# Altium PCB FAR_PCB.PcbDoc
Units mm, origin at the board's own origin, x right, y up, seen from the top; angles counter-clockwise.
Board outline 134.94 x 132.72 mm, 4 copper layers (Top Layer, Layer 1, Layer 2, Bottom Layer), stack 0.664 mm thick; 72 components, 80 nets, 398 pads, 24 vias.
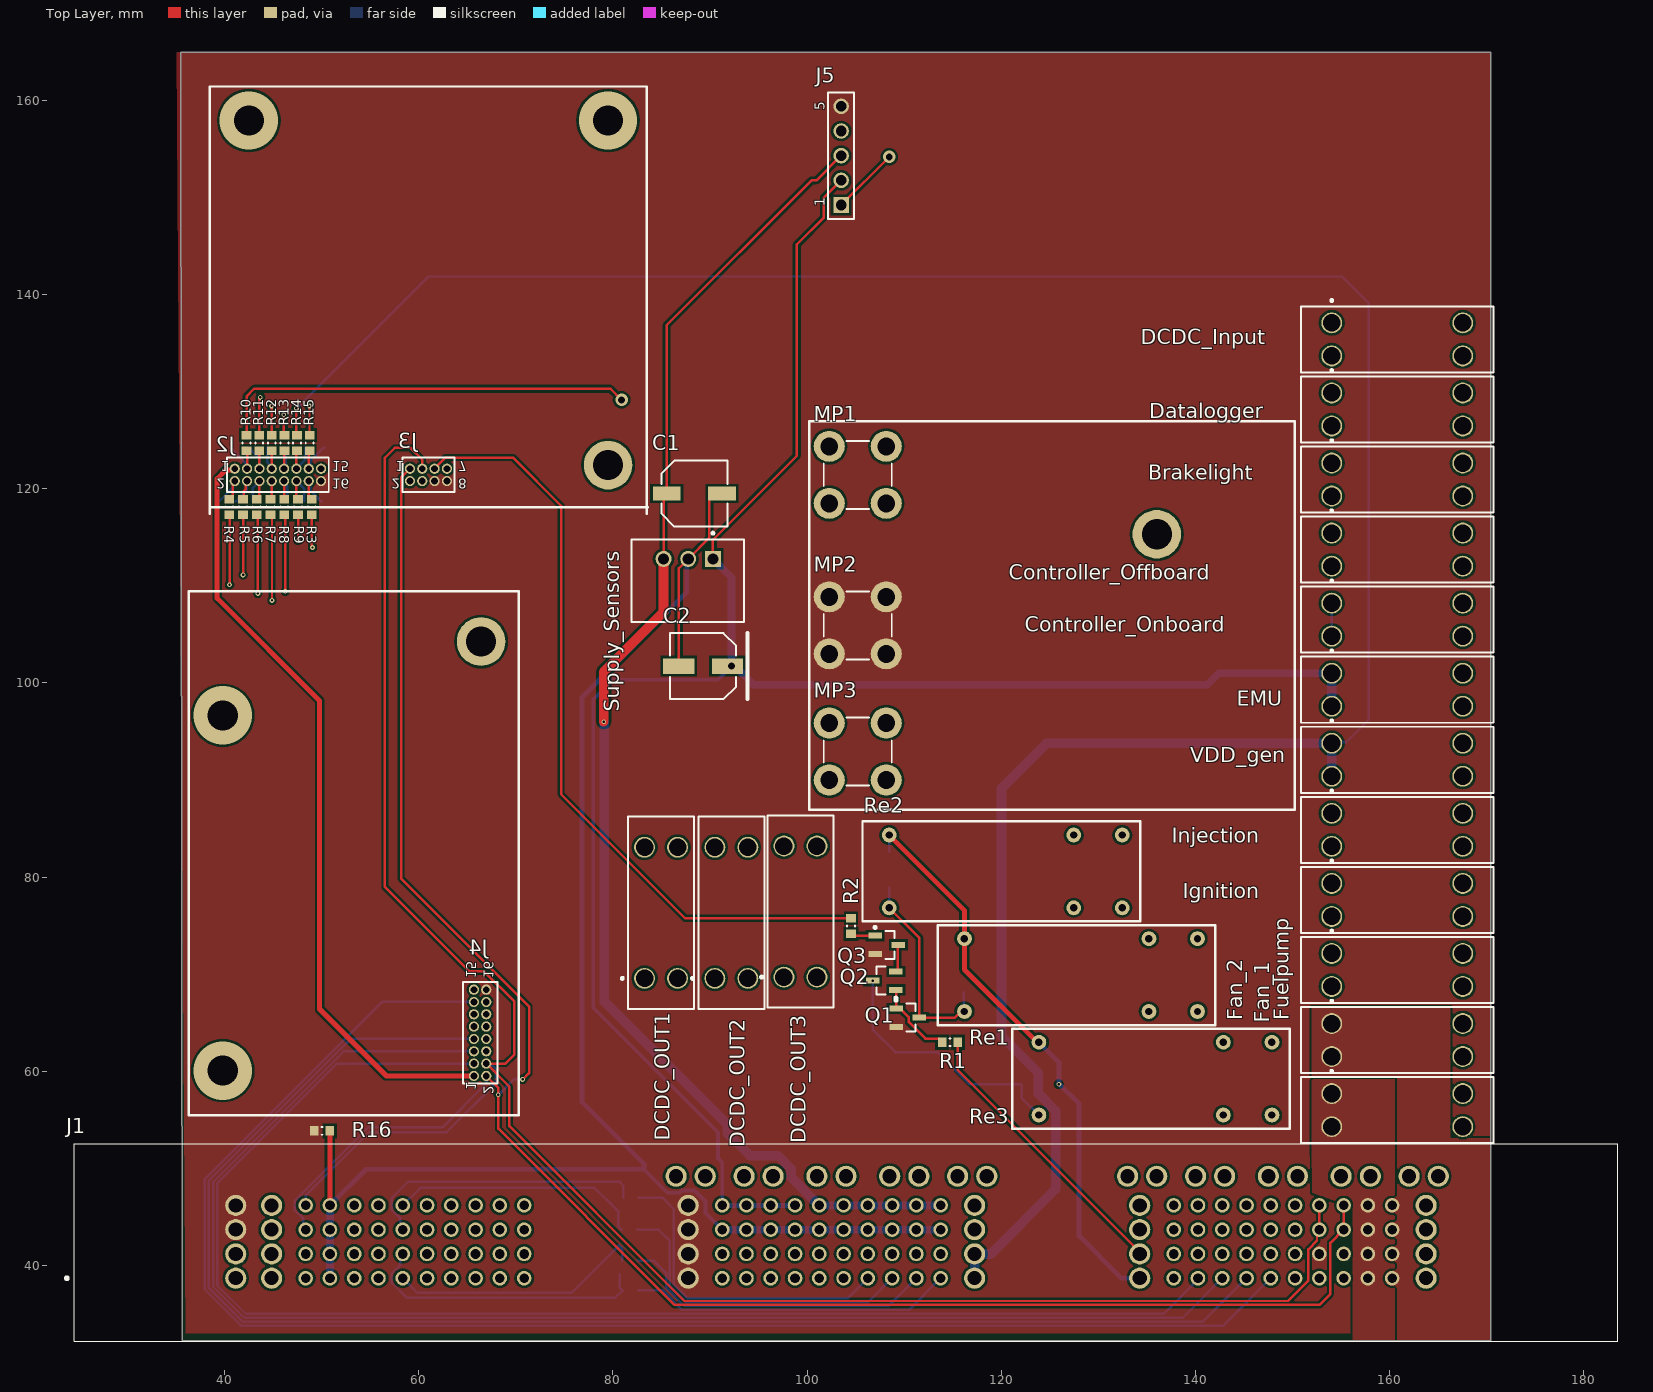
[diagram p0: Top Layer view]
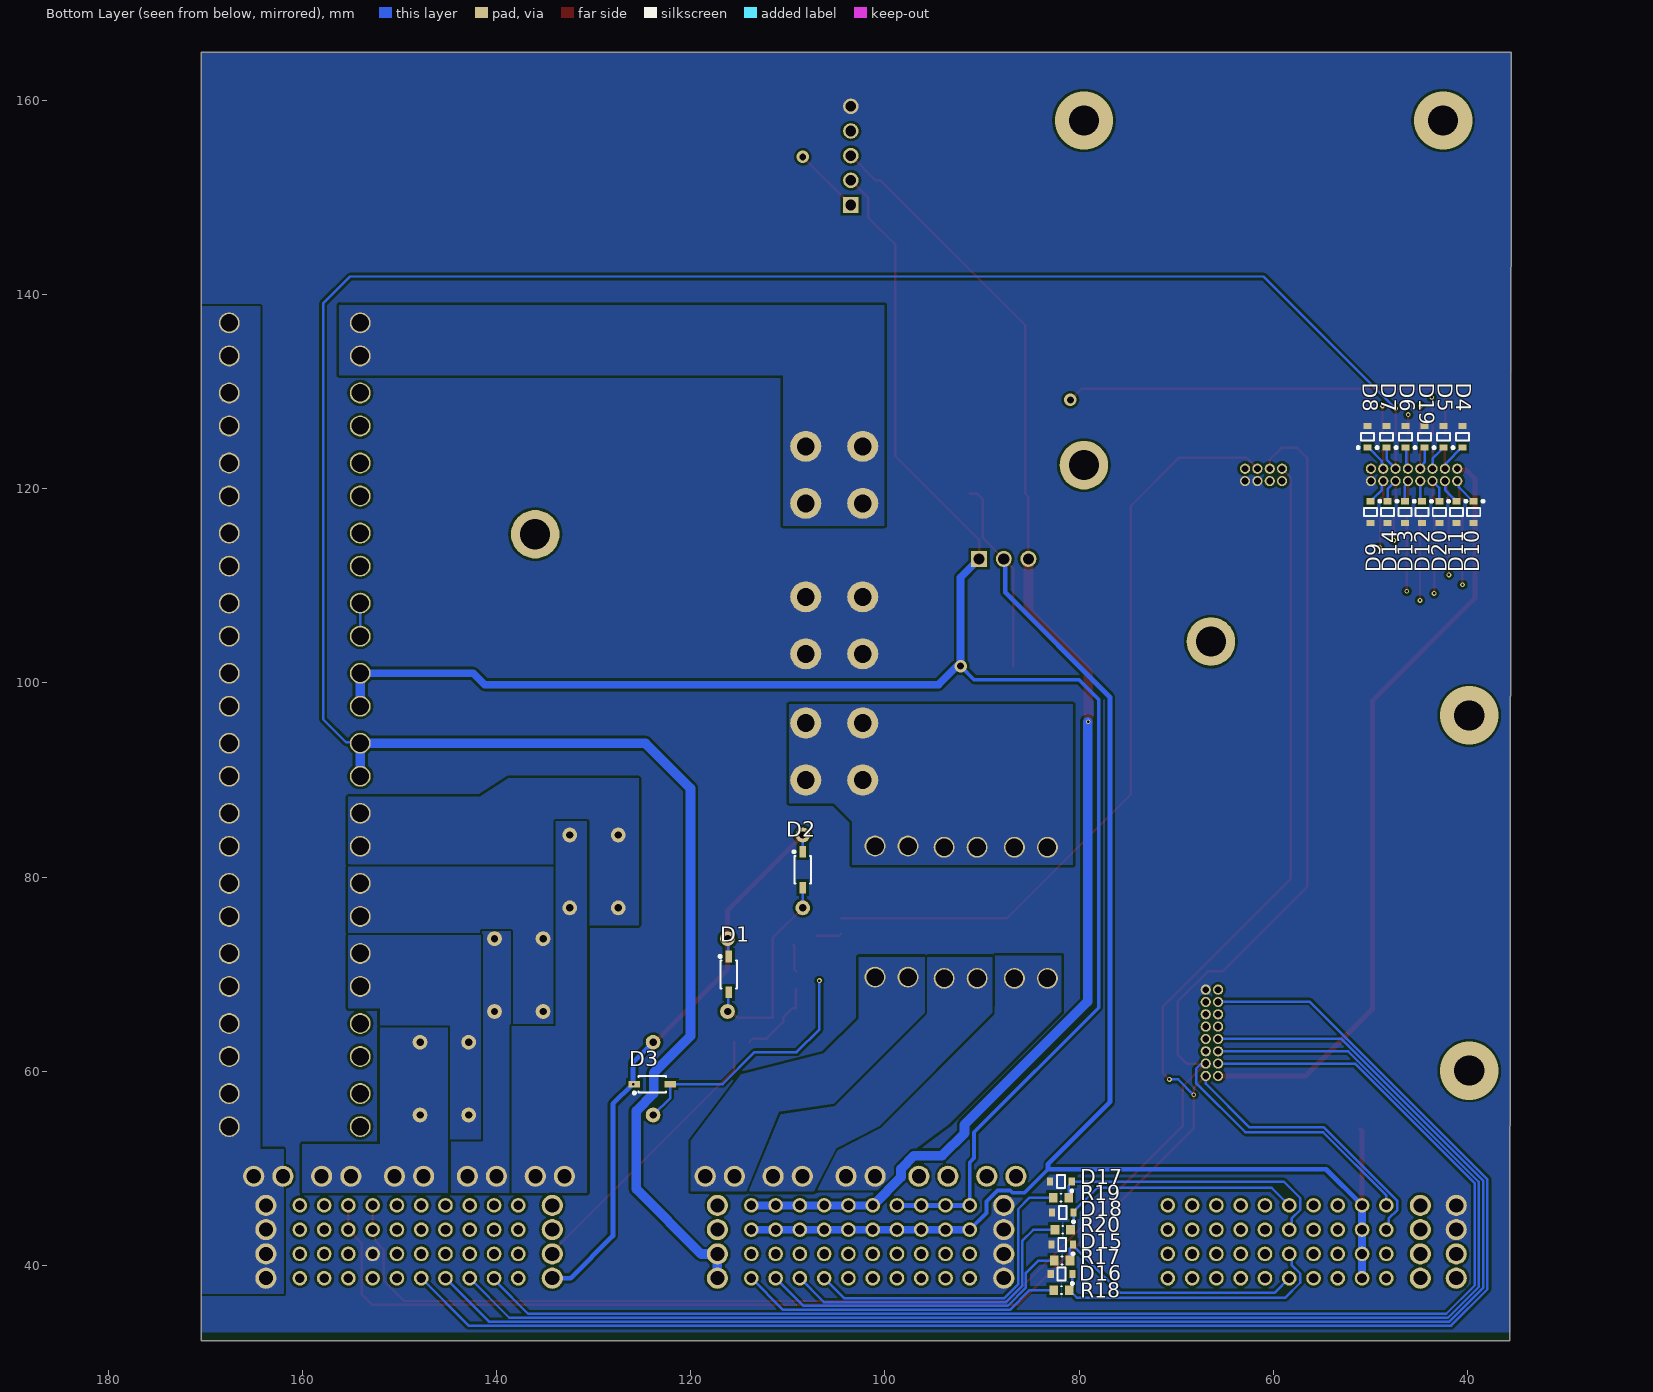
[diagram p1: Bottom Layer view, seen from below]
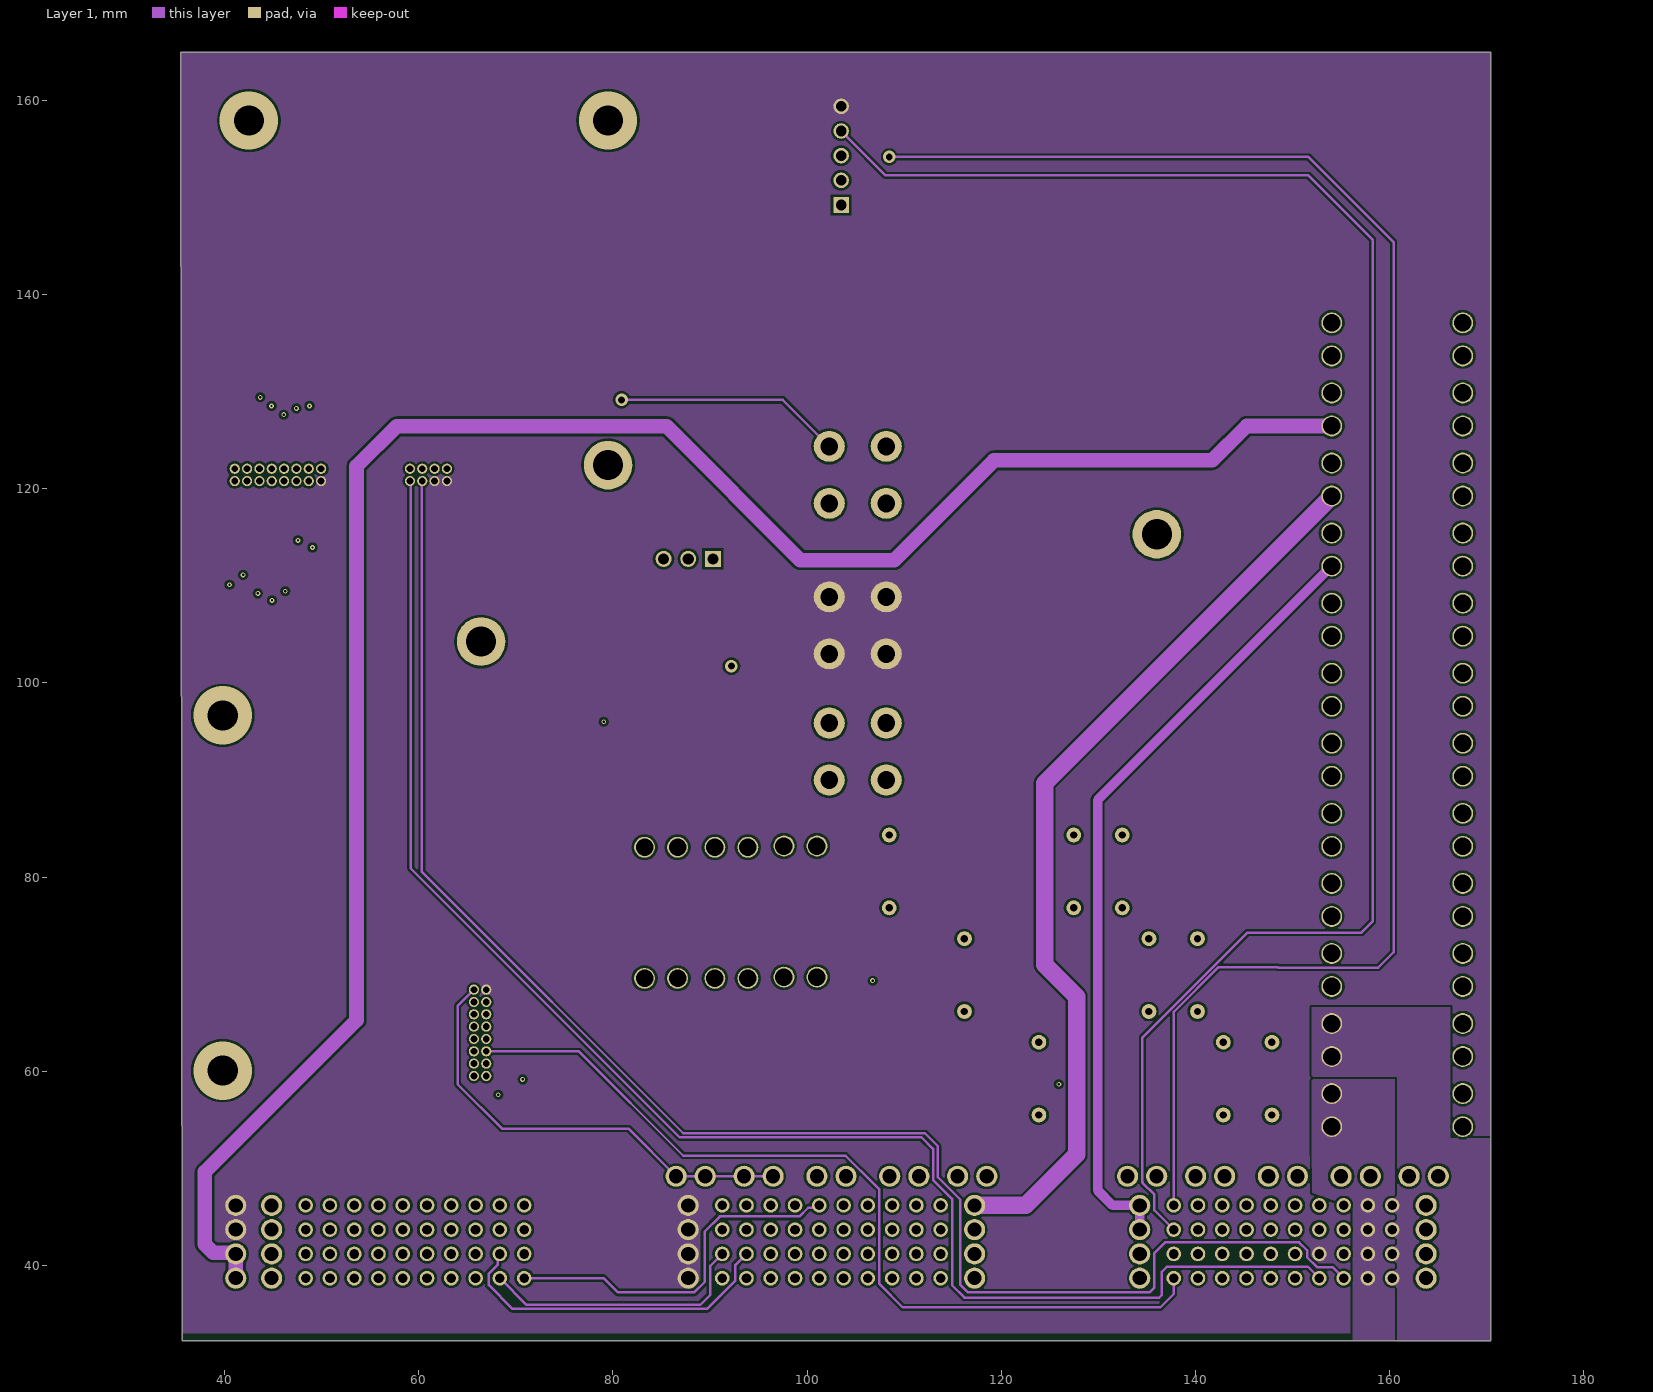
[diagram p2: Layer 1]
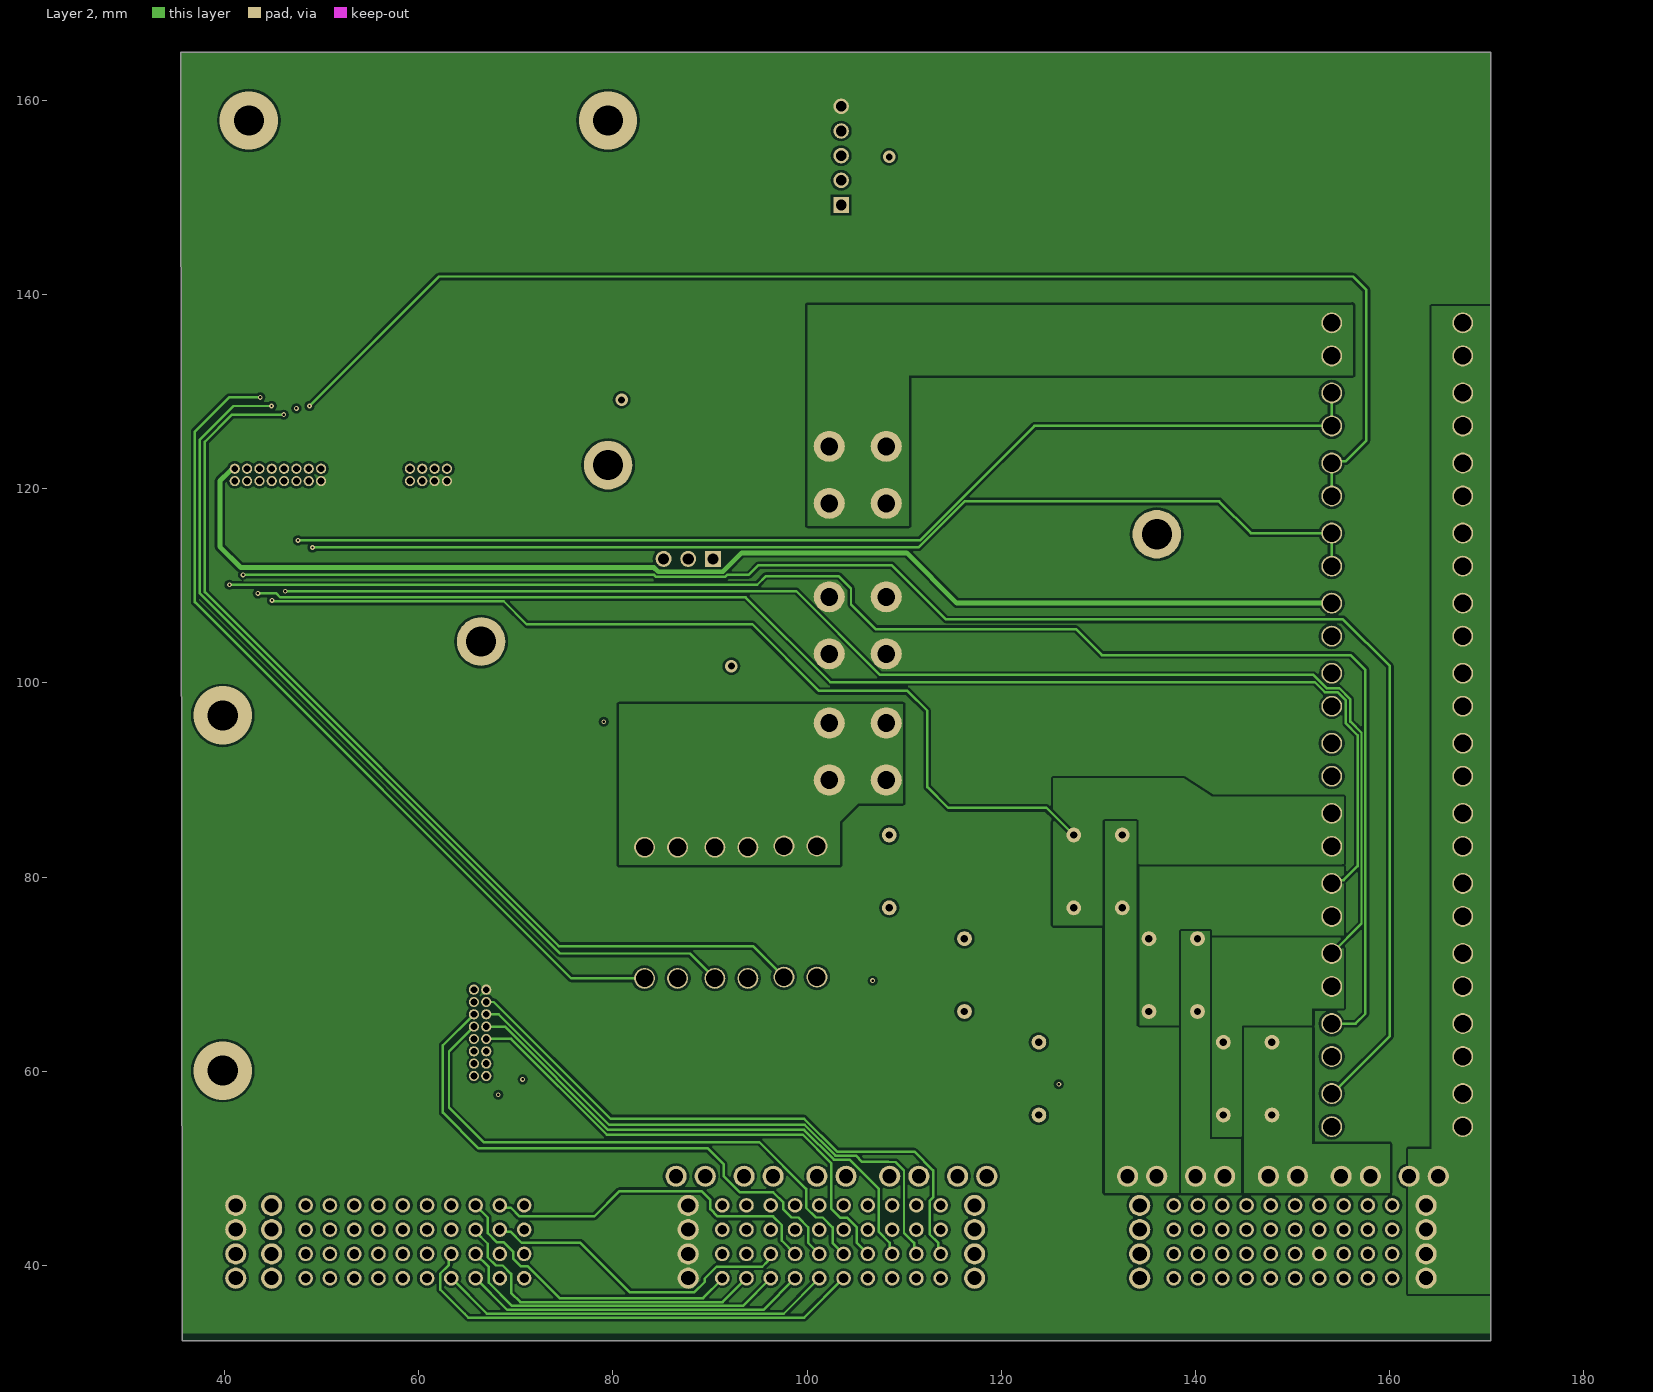
[diagram p3: Layer 2]
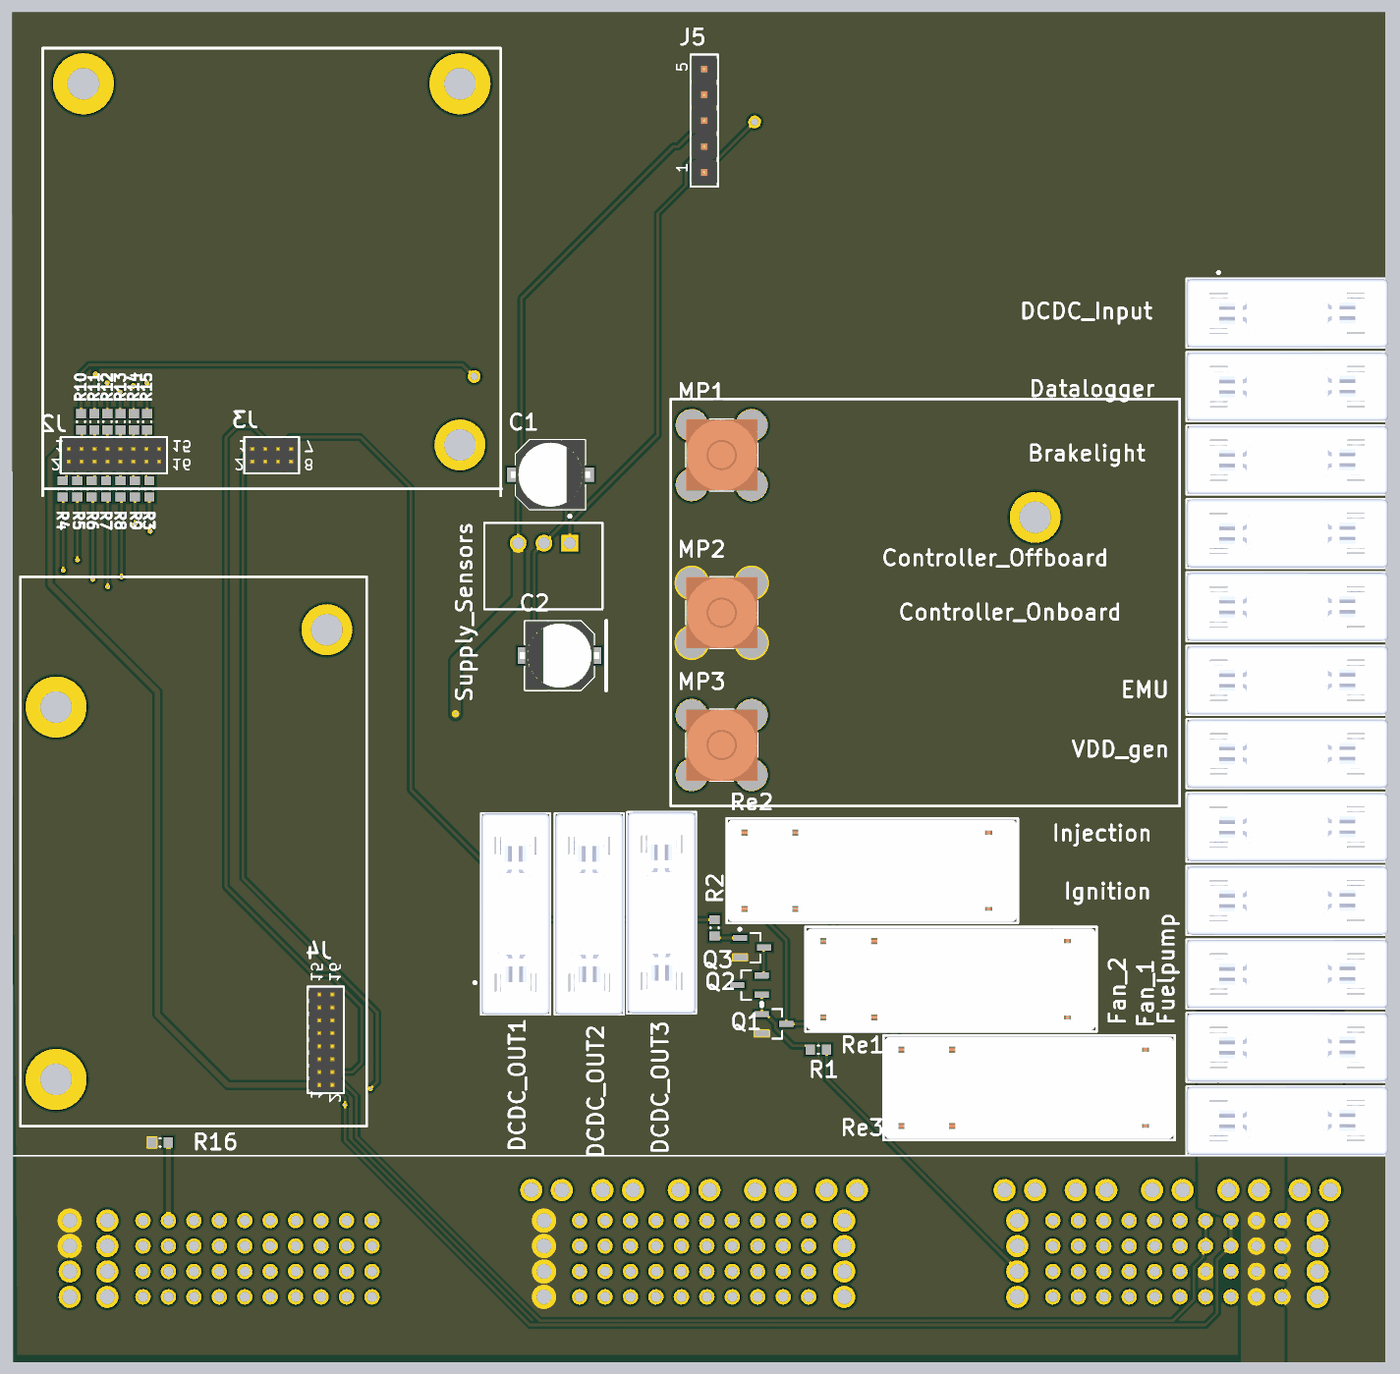
[diagram p4: 3D render of the assembled board from above, using the file's embedded part models]

## Layer stack, top to bottom
Top Solder: solder mask 0.0102, Solder Resist, Dk 3.5
Top Layer: signal copper 0.0356
Dielectric 2: core 0.1016, Core-009, Dk 4.5
Layer 1: signal copper 0.035
Dielectric 1: dielectric 0.32, FR-4, Dk 4.8
Layer 2: signal copper 0.035
Dielectric 3: core 0.1016, Core-009, Dk 4.5
Bottom Layer: signal copper 0.0356
Bottom Solder: solder mask 0.0102, Solder Resist, Dk 3.5

## Board outline
35.623,32.258 170.434,32.258 170.434,164.973 35.496,164.973

## Design rules (kind name [scope] priority, off if disabled: settings)
Clearance [All] p1: gap=0.254 ignorepadtopadclearanceinfootprint=TRUE except(0: Arc-Hole Track-Hole SMDPad-Hole THPad-Hole Via-Hole Fill-Hole Poly-Hole Region-Hole Text-Hole; 0.15: Arc-Arc Arc-Track Track-Track)
PlaneConnect [All] p1: planeconnectstyle=Direct reliefexpansion=0.508 reliefentries=4 reliefconductorwidth=0.254 reliefairgap=0.254
PolygonConnect [All] p1: connectstyle=Direct reliefconductorwidth=0.254 reliefentries=4 polygonreliefangle="90 Angle" airgapwidth=0.254
RoutingVias [All] p1: holewidth=0.711 width=1.27 viastyle="Through Hole" minholewidth=0.711 minwidth=1.27 maxholewidth=0.711 maxwidth=1.27
SolderMaskExpansion [All] p1: expansion=0.102
Width [All] p1: maxlimit=10 minlimit=0.254 preferedwidth=0.254 minimp=50.000000 maximp=50.000000 favimp=50.000000
29 further rules are at their usual default settings.

## Components (designator, comment, footprint, x,y, rotation, side; value= is the part's Value field where it differs from the comment)
Brakelight "3557-2" KSTN-3557-2 160.782,120.95 r0 top
C1 "EEEFK1C101P" PNSC-EEEFK1C101P_L 88.392,119.507 r0 top
C2 "EEEFK1E101XP" PNSC-FK-V-D8_V 89.281,101.727 r180 top
Controller_Offboard "3557-2" KSTN-3557-2 160.782,113.734 r0 top
Controller_Onboard "3557-2" KSTN-3557-2 160.782,106.518 r0 top
D1 "BAT46W-7-F" DIOD-SOD-123-2_V 116.078,69.977 r90 bottom
D2 "BAT46W-7-F" DIOD-SOD-123-2_V 108.458,80.772 r90 bottom
D3 "BAT46W-7-F" DIOD-SOD-123-2_V 123.952,58.674 r0 bottom
D4 "MM3Z4V7T1G" ONSC-SOD-323-2-477-02_V 40.513,125.349 r90 bottom
D5 "MM3Z4V7T1G" ONSC-SOD-323-2-477-02_V 42.469,125.349 r90 bottom
D6 "MM3Z4V7T1G" ONSC-SOD-323-2-477-02_V 46.38,125.349 r90 bottom
D7 "MM3Z4V7T1G" ONSC-SOD-323-2-477-02_V 48.336,125.349 r90 bottom
D8 "MM3Z4V7T1G" ONSC-SOD-323-2-477-02_V 50.292,125.349 r90 bottom
D9 "MM3Z4V7T1G" ONSC-SOD-323-2-477-02_V 49.993,117.602 r270 bottom
D10 "MM3Z4V7T1G" ONSC-SOD-323-2-477-02_V 39.36,117.602 r270 bottom
D11 "MM3Z4V7T1G" ONSC-SOD-323-2-477-02_V 41.132,117.602 r270 bottom
D12 "MM3Z4V7T1G" ONSC-SOD-323-2-477-02_V 44.676,117.602 r270 bottom
D13 "MM3Z4V7T1G" ONSC-SOD-323-2-477-02_V 46.448,117.602 r270 bottom
D14 "MM3Z4V7T1G" ONSC-SOD-323-2-477-02_V 48.221,117.602 r270 bottom
D15 "MM3Z4V7T1G" ONSC-SOD-323-2-477-02_V 81.747,42.164 r0 bottom
D16 "MM3Z4V7T1G" ONSC-SOD-323-2-477-02_V 81.806,39.116 r0 bottom
D17 "MM3Z4V7T1G" ONSC-SOD-323-2-477-02_V 81.869,48.641 r0 bottom
D18 "MM3Z4V7T1G" ONSC-SOD-323-2-477-02_V 81.688,45.466 r0 bottom
D19 "MM3Z4V7T1G" ONSC-SOD-323-2-477-02_V 44.425,125.349 r90 bottom
D20 "MM3Z4V7T1G" ONSC-SOD-323-2-477-02_V 42.904,117.602 r270 bottom
Datalogger "3557-2" KSTN-3557-2 160.782,135.382 r0 top
DCDC_Input "3557-2" KSTN-3557-2 160.782,128.166 r0 top
DCDC_OUT1 "3557-2" KSTN-3557-2 84.963,76.327 r90 top
DCDC_OUT2 "3557-2" KSTN-3557-2 92.202,76.327 r90 top
DCDC_OUT3 "3557-2" KSTN-3557-2 99.314,76.454 r90 top
EMU "3557-2" KSTN-3557-2 160.782,99.302 r0 top
Fan_1 "3557-2" KSTN-3557-2 160.782,63.223 r0 top
Fan_2 "3557-2" KSTN-3557-2 160.782,56.007 r0 top
Fuelpump "3557-2" KSTN-3557-2 160.782,70.439 r0 top
Ignition "3557-2" KSTN-3557-2 160.782,77.655 r0 top
Injection "3557-2" KSTN-3557-2 160.782,84.871 r0 top
J1 "34763-0001" *MOLEX_34763-0001_34763-0001(Primary) 41.157,38.695 r0 top
J2 "62201621121" 62201621121 45.502,121.428 r0 top
J3 "62200821121" 62200821121 61.002,121.428 r0 top
J4 "62201621121" 62201621121 66.321,63.967 r90 top
J5 "61300511121" 61300511121 103.505,154.305 r90 top
MP1 "M3x5mm" 74651173 105.217,121.436 r0 top
MP2 "M3x5mm" 74651173 105.217,105.936 r0 top
MP3 "M3x5mm" 74651173 105.217,92.936 r0 top
Q1 "50C02CH-TL-E" ONSC-CPH-3_V 110.363,65.532 r0 top
Q2 "50C02CH-TL-E" ONSC-CPH-3_V 107.95,69.342 r180 top
Q3 "50C02CH-TL-E" ONSC-CPH-3_V 108.204,73.025 r0 top
R1 "10K 5% 0603(1608)" RESC0603(1608)_N 114.719,62.992 r180 top value="10000.00 Ohm"
R2 "10K 5% 0603(1608)" RESC0603(1608)_N 104.521,74.968 r270 top value="10000.00 Ohm"
R3 "10k 0603" RESC0603(1608)_N 48.978,118.11 r270 top value="10000.00 Ohm"
R4 "10k 0603" RESC0603(1608)_N 40.476,118.11 r270 top value="10000.00 Ohm"
R5 "10k 0603" RESC0603(1608)_N 41.893,118.11 r270 top value="10000.00 Ohm"
R6 "10k 0603" RESC0603(1608)_N 43.31,118.11 r270 top value="10000.00 Ohm"
R7 "10k 0603" RESC0603(1608)_N 44.727,118.11 r270 top value="10000.00 Ohm"
R8 "10k 0603" RESC0603(1608)_N 46.144,118.11 r270 top value="10000.00 Ohm"
R9 "10k 0603" RESC0603(1608)_N 47.561,118.11 r270 top value="10000.00 Ohm"
R10 "10k 0603" RESC0603(1608)_N 42.269,124.714 r90 top value="10000.00 Ohm"
R11 "10k 0603" RESC0603(1608)_N 43.569,124.714 r90 top value="10000.00 Ohm"
R12 "10k 0603" RESC0603(1608)_N 44.869,124.714 r90 top value="10000.00 Ohm"
R13 "10k 0603" RESC0603(1608)_N 46.168,124.714 r90 top value="10000.00 Ohm"
R14 "10k 0603" RESC0603(1608)_N 47.468,124.714 r90 top value="10000.00 Ohm"
R15 "10k 0603" RESC0603(1608)_N 48.768,124.714 r90 top value="10000.00 Ohm"
R16 "0 0603" RESC0603(1608)_N 50.038,53.867 r0 top value="10000.00 Ohm"
R17 "10k 0603" RESC0603(1608)_N 81.747,40.513 r0 bottom value="10000.00 Ohm"
R18 "10k 0603" RESC0603(1608)_N 81.806,37.465 r0 bottom value="10000.00 Ohm"
R19 "10k 0603" RESC0603(1608)_N 81.869,46.99 r0 bottom value="10000.00 Ohm"
R20 "10k 0603" RESC0603(1608)_N 81.688,43.688 r0 bottom value="10000.00 Ohm"
Re1 "Ignition" "Finder 436190120300" 116.205,66.167 r0 top
Re2 "Injection" "Finder 436190120300" 108.458,76.835 r0 top
Re3 "Fuelpump" "Finder 436190120300" 123.875,55.499 r0 top
Supply_Sensors "R-78E5.0-0.5" REPO-R-78E-0.5-3_V 87.757,112.776 r180 top
VDD_gen "3557-2" KSTN-3557-2 160.782,92.087 r0 top

## Footprints (in the part's own frame and the unit in brackets; to place one, negate y for a bottom-side part, rotate by r counter-clockwise, add the part's x,y. Pads: shape width x height; smd on the part's side, far side on the other; paste and mask are expansions set on the pad)
74651173 [mm] "Shank, THR, 4 pins, 7x7mm, M3, thread 5mm"
  round 3.2 hole 1.85: 1(-2.935,-2.935) 1(-2.935,2.935) 1(2.935,-2.935) 1(2.935,2.935)
  silkscreen extent -3.5,-3.5 3.5,3.5, body extent -3.5,-3.5 3.5,3.5, height 8.5
61300511121 [mm] "Pin Header, pitch 2.54 mm, THT, Vertical, single row, 5p"
  rect 1.6x1.6 hole 1.1: 1(-5.08,0)
  round 1.6 hole 1.1: 2(-2.54,0) 3(0,0) 4(2.54,0) 5(5.08,0)
  silkscreen extent -6.5,-1.34 6.5,1.34, body extent -6.35,-1.27 6.35,1.27, height 8.57
62200821121 [mm] "Pin Header, pitch 1.27 mm, THT, Vertical, dual row, 8p"
  round 1.05 hole 0.7: 1(-1.905,0.635) 2(-1.905,-0.635) 3(-0.635,0.635) 4(-0.635,-0.635) 5(0.635,0.635) 6(0.635,-0.635) 7(1.905,0.635) 8(1.905,-0.635)
  silkscreen extent -2.69,-1.78 2.69,1.78, body extent -2.54,-1.7 2.54,1.7, height 5.33
62201621121 [mm] "Pin Header, pitch 1.27 mm, THT, Vertical, dual row, 16p"
  round 1.05 hole 0.7: 1(-4.445,0.635) 2(-4.445,-0.635) 3(-3.175,0.635) 4(-3.175,-0.635) 5(-1.905,0.635) 6(-1.905,-0.635) 7(-0.635,0.635) 8(-0.635,-0.635) 9(0.635,0.635) 10(0.635,-0.635) 11(1.905,0.635) 12(1.905,-0.635) 13(3.175,0.635) 14(3.175,-0.635) 15(4.445,0.635) 16(4.445,-0.635)
  silkscreen extent -5.23,-1.78 5.23,1.78, body extent -5.08,-1.7 5.08,1.7, height 5.33
*MOLEX_34763-0001_34763-0001(Primary) [mm]
  round 1.508 hole 1: A1(29.7,0) A2(29.7,2.5) A3(29.7,5) A4(29.7,7.5) B1(27.2,0) B2(27.2,2.5) B3(27.2,5) B4(27.2,7.5) C1(24.7,0) C2(24.7,2.5) C3(24.7,5) C4(24.7,7.5) D1(22.2,0) D2(22.2,2.5) D3(22.2,5) D4(22.2,7.5) E1(19.7,0) E2(19.7,2.5) E3(19.7,5) E4(19.7,7.5) F1(17.2,0) F2(17.2,2.5) F3(17.2,5) F4(17.2,7.5) G1(14.7,0) G2(14.7,2.5) G3(14.7,5) G4(14.7,7.5) H1(12.2,0) H2(12.2,2.5) H3(12.2,5) H4(12.2,7.5) J1(9.7,0) J2(9.7,2.5) J3(9.7,5) J4(9.7,7.5) K1(7.2,0) K2(7.2,2.5) K3(7.2,5) K4(7.2,7.5) Y7(50.1,7.5) Y8(52.6,7.5) Y9(55.1,7.5) Y10(57.6,7.5) Y11(60.1,7.5) Y12(62.6,7.5) Y13(65.1,7.5) Y14(67.6,7.5) Y15(70.1,7.5) Y16(72.6,7.5) Y19(50.1,5) Y20(52.6,5) Y21(55.1,5) Y22(57.6,5) Y23(60.1,5) Y24(62.6,5) Y25(65.1,5) Y26(67.6,5) Y27(70.1,5) Y28(72.6,5) Y31(50.1,2.5) Y32(52.6,2.5) Y33(55.1,2.5) Y34(57.6,2.5) Y35(60.1,2.5) Y36(62.6,2.5) Y37(65.1,2.5) Y38(67.6,2.5) Y39(70.1,2.5) Y40(72.6,2.5) Y43(50.1,0) Y44(52.6,0) Y45(55.1,0) Y46(57.6,0) Y47(60.1,0) Y48(62.6,0) Y49(65.1,0) Y50(67.6,0) Y51(70.1,0) Y52(72.6,0) Z7(96.6,7.5) Z8(99.1,7.5) Z9(101.6,7.5) Z10(104.1,7.5) Z11(106.6,7.5) Z12(109.1,7.5) Z13(111.6,7.5) Z14(114.1,7.5) Z15(116.6,7.5) Z16(119.1,7.5) Z19(96.6,5) Z20(99.1,5) Z21(101.6,5) Z22(104.1,5) Z23(106.6,5) Z24(109.1,5) Z25(111.6,5) Z26(114.1,5) Z27(116.6,5) Z28(119.1,5) Z31(96.6,2.5) Z32(99.1,2.5) Z33(101.6,2.5) Z34(104.1,2.5) Z35(106.6,2.5) Z36(109.1,2.5) Z37(111.6,2.5) Z38(114.1,2.5) Z39(116.6,2.5) Z40(119.1,2.5) Z43(96.6,0) Z44(99.1,0) Z45(101.6,0) Z46(104.1,0) Z47(106.6,0) Z48(109.1,0) Z49(111.6,0) Z50(114.1,0) Z51(116.6,0) Z52(119.1,0)
  round 2.175 hole 1.45: L1(3.7,0) L2(3.7,2.5) L3(3.7,5) L4(3.7,7.5) M1(0,0) M2(0,2.5) M3(0,5) M4(0,7.5) Y1_1(45.35,10.5) Y1_2(48.35,10.5) Y2_1(52.35,10.5) Y2_2(55.35,10.5) Y3_1(59.85,10.5) Y3_2(62.85,10.5) Y4_1(67.35,10.5) Y4_2(70.35,10.5) Y5_1(74.35,10.5) Y5_2(77.35,10.5) Y6(46.6,7.5) Y17(76.1,7.5) Y18(46.6,5) Y29(76.1,5) Y30(46.6,2.5) Y41(76.1,2.5) Y42(46.6,0) Y53(76.1,0) Z1_1(91.85,10.5) Z1_2(94.85,10.5) Z2_1(98.85,10.5) Z2_2(101.85,10.5) Z3_1(106.35,10.5) Z3_2(109.35,10.5) Z4_1(113.85,10.5) Z4_2(116.85,10.5) Z5_1(120.85,10.5) Z5_2(123.85,10.5) Z6(93.1,7.5) Z17(122.6,7.5) Z18(93.1,5) Z29(122.6,5) Z30(93.1,2.5) Z41(122.6,2.5) Z42(93.1,0) Z53(122.6,0)
  silkscreen extent -17.55,-6.5 142.35,13.87
DIOD-SOD-123-2_V [mm] "SOD-123, 2-Leads, Body 2.85x1.7mm (max), Pitch 3.7mm"
  rect 1.2x0.7 smd: 1(-1.85,0) 2(1.85,0)
  silkscreen extent -1.42,-0.85 1.97,1.03, body extent -1.42,-0.85 1.43,0.85, height 1.45
"Finder 436190120300" [mil] "Relais 5mm"
  round 60 hole 30: 1(0,295.28) 2(0,0) 3(748.03,0) 4(944.88,0) 5(748.03,295.28) 6(944.88,295.28)
  silkscreen extent -108,-55 1018,350, body extent -105,-49 1013,344, height 537
KSTN-3557-2 [mm] "Fuse Holder, PCB Mount, Thru-Hole, Body 19.8x6.8mm, Height 7.4mm"
  round 2.15 hole 1.8: 1(-6.75,1.7) 2(-6.75,-1.7) 3(6.75,1.7) 4(6.75,-1.7)
  silkscreen extent -9.9,-3.4 9.9,4.12, body extent -9.91,-3.37 9.91,3.37, height 7.74
ONSC-CPH-3_V [mm] "SOT23, 3-Leads, Body 2.9x1.6mm, Pitch 0.95mm"
  rect 1.4x0.6 smd: 1(-1.2,0.95) 2(-1.2,-0.95) 3(1.2,0)
  silkscreen extent -1.32,-1.45 0.8,1.92, body extent -0.8,-1.45 0.8,1.45, height 1.05
ONSC-SOD-323-2-477-02_V [mm] "SOD, 2-Leads, Body 1.7x1.25mm"
  rect 0.63x0.83 smd: 1(-1.115,0) 2(1.115,0)
  silkscreen extent -1.24,-0.67 0.4,1.09, body extent -0.85,-0.63 0.85,0.63, height 1.06
PNSC-EEEFK1C101P_L [mm] "Aluminum Electrolytic Capacitor, Body 6.8x6.8mm, IPC High Density"
  rect 2.85x1.4 smd: 1(-2.85,0) 2(2.85,0)
  silkscreen extent -3.4,-3.4 3.4,3.4, body extent -3.9,-3.4 3.9,3.4, height 6.3
PNSC-FK-V-D8_V [mm] "CAPAE, 2-Leads, Body 6.80x6.80mm"
  rect 3.2x1.6 smd: 1(-2.5,0) 2(2.5,0)
  silkscreen extent -4.6,-3.4 3.4,3.4, body extent -3.9,-3.4 3.9,3.4, height 8
REPO-R-78E-0.5-3_V [mm] "THD, 3-Leads, Body 11.6x8.5mm, Pitch 2.54mm"
  rect 1.65x1.65 hole 1.15: 1(-2.54,0)
  round 1.65 hole 1.15: 2(0,0) 3(2.54,0)
  silkscreen extent -5.75,-2.77 5.85,6.5, body extent -5.75,-2 5.85,6.5, height 10.4
RESC0603(1608)_N [mm] "Chip Resistor, Body 1.6x0.8mm, IPC Medium Density"
  rect 0.9x1 smd: 1(-0.8,0) 2(0.8,0)
  silkscreen extent -0.05,-0.4 0.05,0.4, body extent -0.85,-0.47 0.85,0.47, height 0.6

## Part data
Brakelight Controller_Offboard Controller_Onboard Datalogger DCDC_Input DCDC_OUT1 DCDC_OUT2 DCDC_OUT3 EMU Fan_1 Fan_2 Fuelpump Ignition Injection VDD_gen: library part CMP-2000-05461-1, "FUSE HOLDER, PCB MOUNT, 500VAC, 20A, ROHS", Current Rating=30A, Manufacturer=Keystone-Electronics, Voltage=500V, Category=CircuitProtection, Contact Finish=TinNickel, Contact Material=Brass, Datasheet URL=http://datasheet.octopart.com/3557-2-Keystone-datasheet-15715937.pdf, Datasheet Version=Apr-13, Family=Fuseholders, For Use With/Related Products=ATC,ATO257,MINI897, Fuse Size="0.43\"Lx0.15\"Wx0.64\"H(10.92mmx3.81mmx16.25mm)", Fuse Type=Blade, Fuseholder Type=Block, Manufacturer URL=http://www.keyelco.com/, Mounting Type=PCB, Number of Circuits=1, Orientation=Vertical, Series=-, Termination Style=PCPin
C1: library part CMP-2000-06203-1, "Aluminum Electrolytic Capacitor, 100 uF, 20%, 16 V, -55 to 105 degC, 2-Pin SMD, RoHS, Tape and Reel", Capacitance=100µF, Case Size/Dimension=Ø6.3x5.8mm, Lifetime@Temperature=2000Hrs@105°C, Manufacturer=Panasonic, Operating Temp Range=-55to+105°C, Operating Temp-Max=105°C, Package Description="2-Pin Surface Mount Device, Body 6.6 x 6.6 mm", Rated Voltage=16V, Ripple Current=240mA, Datasheet URL=http://datasheet.octopart.com/EEEFK1C101P-Panasonic-datasheet-13266987.pdf, Datasheet Version=11/2012, Impedance=0.36O, Manufacturer URL=http://www.panasonic.com/, Mounting Technology=SurfaceMount, Package Reference=EEEFK1C101P, Series=FK, Type=Can
C2: library part CMP-2000-06206-1, "Aluminum Electrolytic Capacitor, 100 uF, +/- 20%, 25 V, 2-Pin SMD (Size Code D8), -55 to 105 degC, RoHS, Tape and Reel", Capacitance=100µF, Case Size/Dimension=Ø6.3x7.7mm, Lifetime@Temperature=2000Hrs@105°C, Manufacturer=Panasonic, Operating Temp Range=-55to+105°C, Operating Temp-Max=105°C, Package Description="2-Pin Electrolytic Aluminum Capacitor, Body 6.6 x 6.6 mm", Package Reference=FK-V-D8, Rated Voltage=25V, Ripple Current=280mA, Datasheet URL=http://industrial.panasonic.com/cdbs/www-data/pdf/RDE0000/ABA0000C1181.pdf, Datasheet Version=03/2016, Impedance=0.34O, Manufacturer URL=http://www.panasonic.com/, Mounting Technology=SurfaceMount, Package URL=http://industrial.panasonic.com/cdbs/www-data/pdf/RDE0000/DME0000COL48.pdf, Series=FK, Type=Can
D1 D2 D3: library part CMP-0303-00004-1, "Surface Mount Schottky Barrier Diode, 100 V, -55 to 125 degC, 2-Pin SOD123, RoHS, Tape and Reel", Manufacturer="Diodes Inc", Operating Temperature="-55 to 125 degC", ComponentLink1Description="Manufacturer URL", ComponentLink1URL=http://www.diodes.com/, ComponentLink2Description=Datasheet, ComponentLink2URL=http://diodes.com/datasheets/ds30044.pdf, ComponentLink3Description="Package Specification", ComponentLink3URL=http://diodes.com/datasheets/ds30044.pdf, CT@1 V="12 pF Typ.", DatasheetVersion="Rev. 16-2", IR@1.5 V="0.3 uA Max.", Mounting Technology="Surface Mount", PackageDescription="2-Pin SMD, Body 2.7 x 1.55 mm, Height 1.45 mm", Packing="Tape and Reel", PartNumber=BAT46W-7-F, RoHS=TRUE, V(BR)R="100 V Min.", VF@10 mA="0.45 V Max."
D4 D5 D6 D7 D8 D9 D10 D11 D12 D13 D14 D15 D16 D17 D18 D19 D20: library part CMP-1060-00657-1, "Zener Voltage Regulator, 300 mW, 2-Pin SOD-323, Pb-Free, Tape and Reel", Manufacturer="On Semiconductor", ComponentLink1Description="Manufacturer URL", ComponentLink1URL=http://www.onsemi.com/, ComponentLink2Description=Datasheet, ComponentLink2URL=http://www.onsemi.cn/pub_link/Collateral/MM3Z2V4T1-D.PDF, ComponentLink3Description="Package Specification", ComponentLink3URL=http://www.onsemi.com/pub_link/Collateral/477-02.PDF.1, DatasheetVersion="Rev. 9", Mounting Technology="Surface Mount", P Max (W)=0.3, PackageDescription="2-Pin SOD, Body 1.7 x 1.25 mm", PackageReference=SOD-323-2-477-02, PackageVersion="Rev. H, 03/2007", Packing="Tape and Reel", PartNumber=MM3Z4V7T1G, RoHS=Pb-Free, VZ Typ (V)=4.7
J1: "Automotive Connectors CMC HDR ASSY 154 WAY JD MECA 48-53-53", Package=None, Availability=Unavailable, MF=Molex, MP=34763-0001, Price=None, SnapEDA_Link=https://www.snapeda.com/parts/34763-0001/Molex/view-part/?ref=snap
J2 J4: library part CMP-1502-00950-1, "THT Vertical Pin Header WR-PHD, Pitch 1.27 mm, Dual Row, 16 pins", Contact Resistance=20mOhm, Manufacturer="Wurth Elektronik", Operating Temperature=-40to105degC, Rated Current=1A, Withstanding Voltage=500VAC, Working Voltage=100VAC, Datasheet URL=https://katalog.we-online.de/em/datasheet/62201621121.pdf, Gender=Male, Manufacturer URL=http://www.we-online.de, Mounting Technology=THT, Orientation=Vertical, Package Reference=62201621121, Packaging=Box, Part Number=62201621121, Pin Number=16, Pitch=1.27mm, Publisher=WurthElektronik, Row Number=Dual
J3: library part CMP-1502-00947-1, "THT Vertical Pin Header WR-PHD, Pitch 1.27 mm, Dual Row, 8 pins", Contact Resistance=20mOhm, Manufacturer="Wurth Elektronik", Operating Temperature=-40to105degC, Rated Current=1A, Withstanding Voltage=500VAC, Working Voltage=100VAC, Datasheet URL=https://katalog.we-online.de/em/datasheet/62200821121.pdf, Gender=Male, Manufacturer URL=http://www.we-online.de, Mounting Technology=THT, Orientation=Vertical, Package Reference=62200821121, Packaging=Box, Part Number=62200821121, Pin Number=8, Pitch=1.27mm, Publisher=WurthElektronik, Row Number=Dual
J5: "WR-PHD Pin Header, THT, pitch 2.54mm, Single Row, Vertical, 5pin", Contact Resistance=20mOhm, Operating Temperature="-40 to +105degC", Rated Current=3A, Withstanding Voltage=500VAC, Working Voltage=250VAC, ComponentLink1Description=Manufacturer, ComponentLink1URL=http://www.we-online.de, ComponentLink2Description=Datasheet, ComponentLink2URL=https://katalog.we-online.de/em/datasheet/6130xx11121.pdf, Gender=Male, Mounting Technology=THT, Orientation=Vertical, Packaging=Bag, Part Number=61300511121, Pin Number=5, Pitch=2.54mm, Published Date="June 2019", Publisher="Wurth Elektronik", Row Number=Single
MP1 MP2 MP3: library part 74651173, "WP-THRSH REDCUBE THR with external thread, 7x7mm, M3x5mm, 4 pins, 50A", Operating Temperature="-55 to +150degC", Rated Current=50A, ComponentLink1Description=Manufacturer, ComponentLink1URL=http://www.we-online.de, ComponentLink2Description=Datasheet, ComponentLink2URL=https://katalog.we-online.com/em/datasheet/74651173.pdf, Height=8.5mm, Material=Brass, Mounting Technology=SMT, Packaging=Bulk, Part Number=74651173, Pin Number=4, Published Date="September 2019", Publisher="Wurth Elektronik", Size=7x7mm, Surface=Tin, Thread=M3, Thread Length=5mm
Q1 Q2 Q3: library part CMP-1048-00075-1, "Bipolar Transistor, 50 V, 0.5 A, Low VCE(sat), NPN Single, 3-Pin CPH, Pb-Free, Tape and Reel", Manufacturer="On Semiconductor", ComponentLink1Description="Manufacturer URL", ComponentLink1URL=http://www.onsemi.com/, ComponentLink2Description=Datasheet, ComponentLink2URL=http://www.onsemi.com/pub_link/Collateral/50C02CH-D.PDF, ComponentLink3Description="Package Specification", ComponentLink3URL=http://www.onsemi.com/pub_link/Collateral/50A02CH-D.PDF, IC Continuous (A)=0.5, Mounting Technology="Surface Mount", PackageDescription="3-Pin Small Outline Transistor, Body 2.9 x 1.6 mm, Pitch 0.95 mm", PackageReference=CPH-3, Packing="Tape and Reel", PartNumber=50C02CH-TL-E, Polarity=NPN, RoHS=TRUE
R1 R2 R3 R4 R5 R6 R7 R8 R9 R10 R11 R12 R13 R14 R15 R16 R17 R18 R19 R20: library part CMP-1012-00098-1, "10K 0.1W 5% 0603 (1608 Metric)  SMD", Case-EIA=0603, Case-Metric=1608, Power="0.1 W", Tolerance="5 %", Technology=SMT
Re1 Re2 Re3: library part "Finder 4361-0300", "1 Schließer, 16A"
Supply_Sensors: library part CMP-2000-06922-2, "DC/DC-Converter, 5 V Single Output, 500 mA, -40 to 85 degC, 3-Pin THD, RoHS, Tube", Current - Output (Max)=500mA, Manufacturer="Recom Power", Operating Temperature=-40°C~85°C, Package Description="3-Pin Through Hole Device, Body 11.6 x 8.5 mm, Pitch 2.54 mm", Package Reference="SIP Module", Package Version="Rev. 0", Datasheet URL=http://www.recom-power.com/pdf/Innoline/R-78Exx-0.5.pdf, Datasheet Version=01/2017, Efficiency=92%, Manufacturer URL=http://www.recom-power.com/us/americas/home.html, Mounting Technology=ThroughHole, Number of Outputs=1, Packaging=Tube, VIN Max=28V, VIN Min=7V, VOUT=5V

## Free pads (board coordinates)
  round 5 hole 3.1: 8(79.502,122.428) 9(136.017,115.316) 10(66.421,104.267)

## Via types
v1: diameter 0.5, hole 0.25, Top Layer to Bottom Layer, 17 vias
v2: diameter 6, hole 3.1, Top Layer to Bottom Layer, 4 vias
v3: diameter 1.27, hole 0.711, Top Layer to Bottom Layer, 3 vias

## Nets (pads, with @x,y where several pads share a name; then routed paths per layer and width w, separated by ;. In a path a pad name is that pad's centre, name@x,y a point inside that pad or via, vN(x,y) a via of type N, cw(c..) or ccw(c..) an arc to the next point about the centre after c; other vN are vias at no path point)
12V: Brakelight.3 Brakelight.4 Controller_Offboard.3 Controller_Offboard.4 Controller_Onboard.3 Controller_Onboard.4 Datalogger.3 Datalogger.4 DCDC_Input.3 DCDC_Input.4 EMU.3 EMU.4 Fan_1.3 Fan_1.4 Fan_2.3 Fan_2.4 Fuelpump.3 Fuelpump.4 Ignition.3 Ignition.4 Injection.3 Injection.4 J1.Z5_1 J1.Z5_2 J1.Z17 J1.Z29 J1.Z41 J1.Z53 VDD_gen.3 VDD_gen.4
Analog1_Sig: J1.C1 J1.Y46 | length 35.6
  Layer 2 w0.254: J1.C1 69.119,35.433 95.495,35.433 J1.Y46
Analog2_Sig: J1.C2 J1.Y45 | length 34.7
  Layer 2 w0.254: J1.C2 67.222,39.83 67.222,38.225 69.61,35.837 93.399,35.837 J1.Y45
Analog3_Sig: J1.C3 J1.Y44 | length 34.1
  Layer 2 w0.254: J1.C3 65.857,43.49 67.107,42.24 67.107,40.84 67.944,40.003 68.655,40.003 69.521,39.136 69.521,37.187 70.467,36.241 91.303,36.241 J1.Y44
Analog4_Sig: J1.C4 J1.Y43 | length 31.5
  Layer 2 w0.254: J1.C4 67.107,44.945 67.107,43.34 68.059,42.388 68.77,42.388 69.722,41.435 69.722,40.725 70.502,39.945 71.212,39.945 74.512,36.645 89.294,36.645 J1.Y43@91.257,38.608
Analog5_Sig: J1.D1 J1.Y47 | length 40.9
  Layer 2 w0.254: J1.D1 67.023,35.029 97.591,35.029 J1.Y47
Analog6_Sig: J1.D2 J1.Y48 | length 48.6
  Layer 2 w0.254: J1.D2 63.117,40.955 63.117,40.06 62.222,39.165 62.222,37.525 64.718,35.029 65.122,34.625 99.687,34.625 J1.Y48
Analog_GND: C1.2 C2.2 J1.J1 J1.J2 J1.J3 J1.J4 J1.Y19 J1.Y20 J1.Y21 J1.Y22 J1.Y23 J1.Y24 J1.Y25 J1.Y26 J1.Y27 J1.Y28 R16.2 Supply_Sensors.2 | length 173.5
  Top Layer w0.254: R16.2@50.857,53.867 R16.2@51.092,54.102 ; C2.2 86.781,111.8 Supply_Sensors.2 89.944,114.963 89.944,118.934 90.517,119.507 C1.2
  Top Layer w0.5: J1.J4 R16.2@50.857,53.867
  Bottom Layer w0.254: Supply_Sensors.2@87.603,112.622 Supply_Sensors.2
  Bottom Layer w0.4: 83.185,49.911 85.606,47.49 86.872,47.49 87.118,47.736 88.396,47.736 88.761,47.371 88.773,47.371 89.535,46.609 89.535,45.417 J1.Y19
  Bottom Layer w0.5: J1.J4 54.573,49.911 83.185,49.911 83.185,50.463 76.835,56.813 76.835,98.552 87.603,109.32 Supply_Sensors.2@87.603,112.622
  Bottom Layer w0.8: J1.J1 J1.J2 J1.J3 J1.J4 ; J1.Y19 J1.Y20 J1.Y21 J1.Y22 J1.Y23 J1.Y24 J1.Y25 J1.Y26 J1.Y27 J1.Y28
Analog_in1: J1.Y37 J4.8 | length 52.2
  Layer 2 w0.254: J4.8 69.51,63.332 79.375,53.467 99.568,53.467 102.476,50.559 102.476,45.871 103.444,44.903 104.154,44.903 105.122,43.935 105.122,42.33 J1.Y37
Analog_in2: J1.Y38 J4.10 | length 54.6
  Layer 2 w0.254: J4.10 68.875,64.602 79.502,53.975 99.695,53.975 102.755,50.916 104.363,50.916 107.392,47.887 107.392,43.455 108.517,42.33 108.517,41.435 J1.Y38
Analog_in3: J1.Y39 J4.12 | length 58.8
  Layer 2 w0.254: J4.12 68.24,65.872 79.629,54.483 99.759,54.483 102.922,51.32 105.017,51.32 105.664,50.673 108.279,50.673 108.28,50.672 108.375,50.672 108.384,50.663 109.119,50.663 109.982,49.801 109.982,43.365 111.017,42.33 111.017,41.435 J1.Y39
Analog_in4: J1.Y40 J4.14 | length 62.4
  Layer 2 w0.254: J4.14 67.732,67.142 79.756,55.118 99.695,55.118 103.089,51.724 111.055,51.724 112.976,49.803 112.976,47.019 112.622,46.665 112.622,43.225 113.517,42.33 113.517,41.435 J1.Y40
ARef: C1.1 J1.A1 J1.Y11 J1.Y12 J1.Y13 J1.Y14 J1.Y15 J1.Y16 J5.3 Supply_Sensors.3 | length 179.7
  Top Layer w0.254: Supply_Sensors.3 85.217,119.182 C1.1 85.542,136.85 100.457,151.765 100.965,151.765 J5.3
  Top Layer w1: v1(79.064,96.011) 79.064,101.161 85.217,107.314 Supply_Sensors.3
  Layer 1 w0.254: J1.A1 79.047,38.695 80.515,37.227 88.365,37.227 89.458,38.319 89.458,43.501 91.017,45.06 99.227,45.06 100.122,45.955 101.017,45.955 J1.Y11
  Bottom Layer w0.254: J1.Y11@101.198,46.254 J1.Y11
  Bottom Layer w0.8: J1.Y11 J1.Y12 J1.Y13 J1.Y14 J1.Y15 J1.Y16
  Bottom Layer w1: v1@79.121,96.012 79.121,67.183 91.795,54.509 91.795,53.62 94.107,51.308 96.998,51.308 98.348,49.958 98.348,49.103 J1.Y11@101.198,46.254
Backlight_Fuse: D8.1 J2.13 R15.1 | length 4.8
  Top Layer w0.254: J2.13 48.677,123.823 R15.1
  Bottom Layer w0.254: J2.13 48.829,122.215 48.829,122.871 50.192,124.234 D8.1
Brakelight_fused: Brakelight.1 Brakelight.2 J1.Y17 R15.2 | length 235.5
  Top Layer w0.254: v1(48.754,128.524) 48.754,125.528 R15.2
  Layer 1 w1.8: J1.Y17 122.522,46.195 127.762,51.435 127.762,67.691 124.46,70.993 124.46,89.678 Brakelight.2
  Layer 2 w0.254: v1@48.751,128.524 62.086,141.859 156.21,141.859 157.607,140.462 157.607,124.968 155.488,122.849 154.231,122.849 Brakelight.1 Brakelight.2
CAN_EXT1: J1.B1 J1.Y31 | length 28.1
  Layer 1 w0.254: J1.B1 68.365,38.695 71.119,35.941 88.994,35.941 90.043,36.99 90.043,39.981 J1.Y31
  Bottom Layer w0.254: J1.Y31@91.162,41.1 J1.Y31
CAN_EXT2: J1.B2 J1.Y32 | length 34.5
  Layer 1 w0.254: J1.B2 68.117,40.955 68.117,40.06 67.222,39.165 67.222,37.986 69.671,35.537 89.704,35.537 92.622,38.455 92.622,40.06 J1.Y32
CAN_EXT3: J1.B3 J1.Y33 | length 32.7
  Layer 2 w0.254: J1.B3 68.597,43.455 69.492,43.455 70.617,42.33 76.662,42.33 81.765,37.227 88.365,37.227 89.458,38.319 89.458,38.658 90.678,39.878 95.377,39.878 95.927,40.428 95.927,40.526 96.257,40.856 J1.Y33
CAN_EXT4: J1.B4 J1.Y34 | length 36.1
  Layer 2 w0.254: J1.B4 68.597,45.955 69.492,45.955 70.387,45.06 78.074,45.06 80.678,47.663 89.116,47.663 90.043,46.736 90.043,45.804 90.787,45.06 96.497,45.06 97.392,44.165 97.392,42.56 J1.Y34
CAN_H: J1.K3 J1.Z14 J1.Z26 J3.1 J4.2 | length 210.4
  Top Layer w0.254: J3.1 59.086,122.063 58.191,121.168 58.191,79.858 71.374,66.675 71.374,59.817 v1@70.739,59.182 ; J4.2 68.199,58.279 68.199,54.102 86.36,35.941 152.757,35.941 153.892,37.076 153.892,42.33 J1.Z26 J1.Z14
  Bottom Layer w0.254: J1.K3 48.117,43.935 48.117,44.83 47.222,45.725 47.222,46.665 54.786,54.229 62.448,54.229 66.956,58.737 J4.2 ; v1(68.199,57.581) 69.784,59.166 v1(70.705,59.166)
CAN_L: J1.K4 J1.Z13 J1.Z25 J3.3 J4.4 | length 211.2
  Top Layer w0.254: J3.3 60.367,122.999 59.16,124.206 57.531,124.206 56.515,123.19 56.515,78.994 65.215,70.294 66.739,70.294 69.85,67.183 69.85,61.722 68.92,60.792 J4.4@66.967,60.792 ; J4.4 J4.4@66.967,60.792 ; J1.Z13 J1.Z25 152.517,43.455 152.517,42.56 151.622,41.665 151.622,38.455 149.512,36.345 87.353,36.345 69.342,54.356 69.342,58.417 J4.4@66.967,60.792
  Bottom Layer w0.254: J1.K4 48.357,47.214 54.864,53.721 62.865,53.721 67.945,58.801 67.945,60.267 67.572,60.64 67.108,60.64 J4.4
Controller_Fuse_In: D9.1 J2.14 R3.1 | length 4.7
  Top Layer w0.254: J2.14 48.677,119.211 R3.1
  Bottom Layer w0.254: J2.14 48.823,120.647 48.823,119.887 49.705,119.005 49.705,118.905 49.893,118.717 D9.1
Controller_Fused: Controller_Offboard.1 Controller_Offboard.2 J1.Z6 J1.Z18 R3.2 | length 196.8
  Top Layer w0.254: R3.2 48.978,114.101 49.061,114.017 v1(49.061,113.951)
  Layer 1 w1: J1.Z18 J1.Z6 131.478,46.195 129.921,47.752 129.921,87.923 Controller_Offboard.2
  Layer 2 w0.254: v1(49.061,113.951) 49.093,113.982 111.505,113.982 116.22,118.697 142.436,118.697 145.699,115.434 Controller_Offboard.1 Controller_Offboard.2
Controller_Onboard_Fused: Controller_Onboard.1 Controller_Onboard.2 J2.1 J4.1 | length 210.7
  Top Layer w0.254: J2.1@40.943,121.949 J2.1
  Top Layer w0.5: J2.1@40.943,121.949 40.151,121.949 39.243,121.041 39.243,108.712 49.784,98.171 49.784,66.421 56.683,59.522 J4.1
  Layer 2 w0.254: 40.533,121.813 40.592,121.813 40.842,122.063 J2.1
  Layer 2 w0.5: 40.533,121.813 39.52,120.8 39.52,114.04 41.673,111.887 84.227,111.887 84.667,111.447 91.331,111.447 93.272,113.388 110.259,113.388 115.429,108.218 Controller_Onboard.1
  Bottom Layer w0.254: Controller_Onboard.2 Controller_Onboard.1
Datalogger_Fused: DCDC_Input.1 DCDC_Input.2 J1.M1 J1.M2 R9.2 | length 323.7
  Top Layer w0.254: R9.2 47.57,117.301 v1(47.57,114.681)
  Layer 1 w1.5: J1.M1 J1.M2 41.028,41.324 38.829,41.324 37.95,42.203 37.95,49.634 53.594,65.278 53.594,122.301 57.725,126.432 85.531,126.432 99.314,112.649 108.966,112.649 119.253,122.936 141.732,122.936 145.262,126.466 DCDC_Input.2
  Layer 2 w0.254: v1@47.567,114.681 v1(47.57,114.681) 111.633,114.681 123.418,126.466 DCDC_Input.2 DCDC_Input.1
DCDC_Fused_Input: Datalogger.1 Datalogger.2 MP1.1 R10.2 | length 66.8
  Top Layer w0.254: R10.2 42.269,129.518 43.053,130.302 79.756,130.302 v3(80.899,129.159)
  Layer 1 w0.254: v3(80.899,129.159) 97.494,129.159 MP1.1@102.282,124.371
DCDC_Input_Fuse: D4.1 J2.3 R10.1 | length 4.9
  Top Layer w0.254: R10.1 42.327,123.856 J2.3
  Bottom Layer w0.254: D4.1 40.613,124.234 42.175,122.672 42.175,122.215 J2.3
DCDC_OUT: DCDC_OUT1.3 DCDC_OUT1.4 DCDC_OUT2.3 DCDC_OUT2.4 DCDC_OUT3.3 DCDC_OUT3.4 MP3.1
DCDC_OUT1: DCDC_OUT1.1 DCDC_OUT1.2 J1.Y3_1 J1.Y3_2 R11.2 | length 92
  Top Layer w0.254: R11.2 43.569,129.241 43.674,129.346 v1(43.674,129.413)
  Layer 2 w0.254: v1(43.674,129.413) 40.475,129.413 36.957,125.895 36.957,108.331 75.711,69.577 DCDC_OUT1.1
DCDC_OUT2: DCDC_OUT2.1 DCDC_OUT2.2 J1.Y4_1 J1.Y4_2 R12.2 | length 97.1
  Top Layer w0.254: v1(44.842,128.524) 44.842,125.541 R12.2
  Layer 2 w0.254: v1@44.84,128.524 40.925,128.524 37.465,125.064 37.465,109.22 74.549,72.136 87.943,72.136 DCDC_OUT2.1
DCDC_OUT3: DCDC_OUT3.1 DCDC_OUT3.2 J1.Y5_1 J1.Y5_2 R13.2 | length 103
  Top Layer w0.254: v1(46.101,127.635) 46.101,125.582 R13.2
  Layer 2 w0.254: v1(46.101,127.635) 40.767,127.635 37.973,124.841 37.973,109.347 74.422,72.898 94.42,72.898 DCDC_OUT3.1
Dig1_Sig: D15.1 J1.F1 R17.1 | length 26.6
  Bottom Layer w0.254: J1.F1 59.841,37.211 75.779,37.211 80.632,42.064 80.947,41.749 R17.1
Dig1_Sig_in: J1.Y51 R17.2 | length 32.7
  Bottom Layer w0.254: R17.2 84.201,40.513 85.471,39.243 85.471,37.719 87.353,35.837 108.399,35.837 J1.Y51
Dig2_Sig: D16.1 J1.F2 R18.1 | length 30
  Bottom Layer w0.254: J1.F2 58.117,40.955 58.117,40.06 57.222,39.165 57.222,38.225 58.744,36.703 80.244,36.703 80.633,37.092 80.683,37.092 81.006,37.415 80.691,37.73 D16.1
Dig2_Sig_in: J1.Y52 R18.2 | length 33.3
  Bottom Layer w0.254: R18.2 85.09,37.465 87.122,35.433 110.495,35.433 J1.Y52
Dig3_Sig: D17.1 J1.F3 R19.1 | length 29.7
  Bottom Layer w0.254: J1.F3 58.117,43.935 58.117,44.83 57.222,45.725 57.222,46.935 58.928,48.641 D17.1 80.754,48.541 81.069,48.226 R19.1
Dig3_Sig_in: J1.Y49 R19.2 | length 33.3
  Bottom Layer w0.254: R19.2 85.09,46.99 86.279,45.801 86.279,38.054 87.688,36.645 104.207,36.645 J1.Y49
Dig4_Sig: D18.1 J1.F4 R20.1 | length 26
  Bottom Layer w0.254: J1.F4 60.168,48.006 78.099,48.006 80.351,45.754 80.385,45.754 80.573,45.566 80.573,44.003 R20.1
Dig4_Sig_in: J1.Y50 R20.2 | length 33.1
  Bottom Layer w0.254: R20.2 84.709,43.688 85.875,42.522 85.875,37.886 87.52,36.241 106.303,36.241 J1.Y50
Digital_1: J1.Z46 J4.7 | length 154.6
  Bottom Layer w0.254: J4.7 52.982,63.332 38.354,48.704 38.354,37.719 41.852,34.221 140.783,34.221 J1.Z46
Digital_2: J1.Z45 J4.5 | length 150.1
  Bottom Layer w0.254: J4.5 52.283,62.062 38.839,48.618 38.839,37.806 42.02,34.625 138.687,34.625 J1.Z45
Digital_3: J1.Z44 J4.3 | length 145.9
  Bottom Layer w0.254: J4.3 51.584,60.792 39.243,48.451 39.243,37.973 42.187,35.029 136.756,35.029 140.017,38.29 140.017,38.455 J1.Z44
Dl_FUSE_IN: D14.1 J2.12 R9.1 | length 4.4
  Top Layer w0.254: J2.12 47.407,119.064 R9.1
  Bottom Layer w0.254: J2.12 47.407,120.782 48.221,119.968 D14.1
Emu_Fuse: D7.1 J2.11 R14.1 | length 4.4
  Top Layer w0.254: J2.11 47.407,123.853 R14.1
  Bottom Layer w0.254: J2.11 47.407,122.074 48.336,123.003 D7.1
Emu_fused: J1.Y41 J1.Y53 R14.2 VDD_gen.1 VDD_gen.2 | length 264.2
  Top Layer w0.254: v1(47.41,128.27) 47.41,125.573 R14.2
  Bottom Layer w0.254: v1@47.407,128.27 60.996,141.859 155.072,141.859 157.861,139.07 157.861,96.266 155.488,93.893 154.138,93.893 VDD_gen.1
  Bottom Layer w1: J1.Y53 J1.Y41 118.919,41.195 125.603,47.879 125.603,55.915 123.812,57.705 123.812,59.837 120.015,63.634 120.015,89.154 124.648,93.787 VDD_gen.1 VDD_gen.2
ETC_In: J1.Z30 R1.1 | length 29.6
  Top Layer w0.254: R1.1 115.519,60.122 134.257,41.384 J1.Z30
Fan1_Fuse_In: D10.1 J2.2 R4.1 | length 5
  Top Layer w0.254: R4.1 40.526,118.91 40.849,119.233 40.849,120.37 41.057,120.578 J2.2
  Bottom Layer w0.254: D10.1 39.46,118.717 40.905,120.162 40.905,120.641 J2.2
Fan1_Fused: Fan_1.1 Fan_1.2 J1.Z16 J1.Z28 J1.Z40 J1.Z52 R4.2 | length 168.8
  Top Layer w0.254: R4.2 40.515,117.271 v1(40.515,110.109)
  Layer 2 w0.254: v1@40.513,110.109 v1(40.515,110.109) 94.869,110.109 95.758,110.998 103.251,110.998 104.521,109.728 104.521,108.077 107.061,105.537 127.698,105.537 130.365,102.87 155.956,102.87 157.503,101.323 157.503,65.936 156.49,64.923 Fan_1.1
Fan1_PWM: J1.Z49 J3.2 | length 162.1
  Layer 1 w0.254: J3.2 59.182,120.708 59.182,80.899 86.868,53.213 111.771,53.213 112.976,52.009 112.976,48.822 114.935,46.863 114.935,37.973 116.205,36.703 136.271,36.703 136.525,36.957 136.525,39.348 137.055,39.878 151.574,39.878 J1.Z49
Fan2_Fuse_In: D11.1 J2.4 R5.1 | length 4.7
  Top Layer w0.254: R5.1@41.963,118.91 41.963,119.741 42.175,119.953 42.175,120.641 J2.4
  Bottom Layer w0.254: D11.1 41.232,118.717 41.42,118.905 41.42,119.005 42.302,119.887 42.302,120.768 J2.4
Fan2_Fused: Fan_2.1 Fan_2.2 J1.Z15 J1.Z27 J1.Z39 J1.Z51 R5.2 | length 175.7
  Top Layer w0.254: R5.2 41.912,117.291 v1(41.912,111.125)
  Layer 2 w0.254: v1(41.912,111.125) 84.243,111.125 84.448,110.92 91.549,110.92 91.754,111.125 93.98,111.125 94.996,112.141 108.712,112.141 114.3,106.553 155.194,106.553 160.02,101.727 160.02,63.627 154.1,57.707 Fan_2.1
Fan2_PWM: J1.Z50 J3.4 | length 166.3
  Layer 1 w0.254: J3.4 60.325,120.751 60.325,80.544 87.249,53.62 112.141,53.62 113.457,52.304 113.457,49.103 115.789,46.771 115.789,38.008 116.57,37.227 135.271,37.227 135.763,37.719 135.763,41.275 136.876,42.388 150.67,42.388 151.507,41.55 151.507,40.84 152.517,39.83 154.122,39.83 J1.Z50
Flatshift: J1.Z47 J4.13 | length 160
  Bottom Layer w0.254: J4.13 65.645,67.183 56.261,67.183 37.95,48.872 37.95,37.552 41.685,33.817 142.879,33.817 J1.Z47
FP_CTRL: D3.1 Q2.3 Re3.2 | length 26.6
  Bottom Layer w0.254: v1(106.75,69.342) 106.75,64.319 109.093,61.976 113.411,61.976 116.713,58.674 D3.1 122.102,57.272 Re3.2
FP_FUSED: J1.Z3_1 J1.Z3_2 J1.Z4_1 J1.Z4_2 Re3.4 Re3.6
Fuelpump_CTRL: J3.5 R2.1 | length 80.4
  Top Layer w0.254: J3.5 61.637,122.074 62.766,123.203 69.71,123.203 74.676,118.237 74.676,88.519 87.427,75.768 R2.1
Fuelpump_Fuse_In: D13.1 J2.10 R8.1 | length 4.1
  Top Layer w0.254: J2.10 46.137,118.917 R8.1
  Bottom Layer w0.254: J2.10 46.137,120.578 46.448,120.266 D13.1
Fuelpump_Fused: Fuelpump.1 Fuelpump.2 R8.2 Re3.3 Re3.5 | length 150.1
  Top Layer w0.254: R8.2 46.257,117.197 v1(46.257,109.448)
  Layer 2 w0.254: v1(46.257,109.448) 98.903,109.448 107.513,100.838 152.137,100.838 153.513,99.462 154.802,99.462 155.956,98.309 155.956,96.012 157.099,94.869 157.099,75.206 Fuelpump.1
Gear_Sensor_Digital: J1.Z43 J4.6 | length 89.6
  Layer 1 w0.254: J4.6 76.495,62.062 87.249,51.308 103.971,51.308 106.903,48.376 107.442,47.837 107.442,38.1 109.855,35.687 136.375,35.687 137.757,37.069 J1.Z43
GND: D4.2 D5.2 D6.2 D7.2 D8.2 D9.2 D10.2 D11.2 D12.2 D13.2 D14.2 D15.2 D16.2 D17.2 D18.2 D19.2 D20.2 J1.M3 J1.M4 J1.Y6 J1.Y18 J1.Y30 J1.Y42 J1.Z37 J2.16 J3.6 J3.8 J4.16 J5.5 MP2.1 Q1.2 Q3.2 R16.1
IGN_FUSED: J1.Z2_1 J1.Z2_2 Re1.4 Re1.6
IGN_INJ_CTRL: D1.1 D2.1 Q1.3 Re1.2 Re2.2 | length 21.6
  Top Layer w0.254: Re2.2 111.563,73.73 Q1.3 115.226,65.532 115.861,66.167 Re1.2
  Bottom Layer w0.254: Re2.2 D2.1 ; D1.1 116.141,68.064 116.141,66.23 Re1.2
Ignition_Fuse_In: D20.1 J2.6 R6.1 | length 4.4
  Top Layer w0.254: R6.1 43.597,119.197 J2.6
  Bottom Layer w0.254: D20.1 42.904,120.089 43.597,120.782 J2.6
Ignition_Fused: Ignition.1 Ignition.2 R6.2 Re1.3 Re1.5 | length 145.3
  Top Layer w0.254: R6.2 43.434,117.186 v1(43.434,109.22)
  Layer 2 w0.254: v1(43.434,109.22) 45.339,109.22 45.743,108.816 93.665,108.816 102.405,100.076 152.294,100.076 153.312,99.058 154.635,99.058 155.488,98.206 155.488,95.823 156.695,94.616 156.695,81.13 155.251,79.686 154.908,79.686 Ignition.1@154.476,79.254
INJ_FUSED: J1.Z1_1 J1.Z1_2 Re2.4 Re2.6
Injection_Fuse_In: D12.1 J2.8 R7.1 | length 4.1
  Top Layer w0.254: R7.1 44.867,119.05 J2.8
  Bottom Layer w0.254: D12.1 44.679,118.717 44.867,118.905 J2.8
Injection_Fused: Injection.1 Injection.2 R7.2 Re2.3 Re2.5 | length 106.1
  Top Layer w0.254: R7.2 44.891,117.147 v1(44.891,108.499)
  Layer 2 w0.254: v1(44.891,108.499) 44.977,108.412 68.753,108.412 71.12,106.045 94.361,106.045 101.219,99.187 110.339,99.187 112.395,97.131 112.395,89.281 114.531,87.145 124.648,87.145 Re2.5
NetQ1_1: Q1.1 Q2.1 R1.2 | length 8.4
  Top Layer w0.254: Q2.1 109.163,68.379 Q1.1 109.563,66.482 110.482,65.563 110.482,65.074 112.191,63.365 113.596,63.365 113.919,63.042 R1.2
NetQ2_2: Q2.2 Q3.3 | length 2.8
  Top Layer w0.254: Q2.2 109.323,70.465 109.323,72.944 Q3.3
NetQ3_1: Q3.1 R2.2 | length 2.6
  Top Layer w0.254: R2.2 104.714,73.975 Q3.1
NWSU_IN: J1.Z7 J5.1 | length 180.9
  Top Layer w0.254: J5.1 v3(108.458,154.178)
  Layer 1 w0.254: v3(108.458,154.178) 151.638,154.178 160.401,145.415 160.401,72.263 158.821,70.683 148.529,70.683 148.473,70.739 142.367,70.739 137.757,66.129 J1.Z7
NWSU_OUT: J1.Z19 J5.4 | length 179.4
  Layer 1 w0.254: J5.4 108.077,152.273 151.638,152.273 158.242,145.669 158.242,75.438 157.099,74.295 145.352,74.295 134.538,63.482 134.538,48.587 134.556,48.569 134.556,48.514 135.763,47.307 135.763,45.689 J1.Z19
Servo1_Fuse: D5.1 J2.5 R11.1 | length 4.6
  Top Layer w0.254: R11.1 43.597,123.886 J2.5
  Bottom Layer w0.254: D5.1 42.569,124.234 42.757,124.046 42.757,123.946 43.597,123.106 J2.5
Servo2_Fuse: D19.1 J2.7 R12.1 | length 4.2
  Top Layer w0.254: J2.7 44.867,123.912 R12.1
  Bottom Layer w0.254: D19.1 44.425,122.721 44.867,122.278 J2.7
Servo3_Fuse: D6.1 J2.9 R13.1 | length 4.1
  Top Layer w0.254: J2.9 46.137,123.883 R13.1
  Bottom Layer w0.254: J2.9 46.137,122.278 46.325,122.466 46.325,124.179 D6.1
Servo_1: J1.Y36 J4.9 | length 58.4
  Layer 2 w0.254: J4.9 65.675,64.602 63.119,62.046 63.119,56.261 66.675,52.705 95.074,52.705 99.892,47.887 99.892,45.955 100.902,44.945 101.612,44.945 102.622,43.935 102.622,42.33 J1.Y36
Servo_2: J1.Y35 J4.11 | length 58.3
  Layer 2 w0.254: J4.11 65.675,65.872 62.484,62.681 62.484,55.753 66.167,52.07 89.789,52.07 91.437,50.422 91.437,49.188 93.086,47.54 96.517,47.54 97.564,46.493 97.564,45.782 98.402,44.945 99.112,44.945 100.122,43.935 100.122,42.33 J1.Y35
Shutdown_In: D1.2 D2.2 D3.2 J1.Z42 Re1.1 Re2.1 Re3.1 | length 61.2
  Top Layer w0.254: Re3.1@123.691,62.999 Re3.1
  Top Layer w0.5: Re2.1 116.205,76.588 Re1.1 116.205,70.485 Re3.1@123.691,62.999
  Bottom Layer w0.254: D2.2 Re2.1 ; D1.2 116.141,71.89 116.141,73.604 Re1.1 ; v1(125.927,58.674) D3.2@125.984,58.674
  Bottom Layer w0.5: Re3.1 125.927,60.947 v1(125.927,58.674) ; D3.2@125.984,58.674 128.016,56.642 128.016,43.053 132.374,38.695 J1.Z42
VCC_VDD_Sensors: C2.1 EMU.1 EMU.2 J1.Y7 J1.Y8 J1.Y9 J1.Y10 J5.2 Supply_Sensors.1 | length 203.2
  Top Layer w0.254: Supply_Sensors.1 90.297,114.745 98.933,123.381 98.933,145.161 101.727,147.955 101.727,149.987 J5.2
  Bottom Layer w0.4: J1.Y7 91.257,50.602 90.805,51.054 90.805,53.721 77.978,66.548 77.978,98.298 80.01,100.33 90.805,100.33 v3(92.202,101.727)
  Bottom Layer w0.5: J1.Y7 J1.Y8 J1.Y9 J1.Y10
  Bottom Layer w0.8: Supply_Sensors.1 92.202,110.871 v3(92.202,101.727) ; v3@92.583,101.727 94.488,99.822 141.224,99.822 142.404,101.002 EMU.1
  Bottom Layer w1: EMU.2 EMU.1
VDD_CMC: J1.Y1_1 J1.Y1_2 J1.Y2_1 J1.Y2_2 J4.15 | length 46.9
  Layer 1 w0.254: J4.15 65.675,68.412 64.008,66.745 64.008,58.674 68.58,54.102 81.6,54.102 J1.Y1_1 J1.Y1_2 J1.Y2_1 J1.Y2_2
pads on no net: J1.A2 J1.A3 J1.A4 J1.D3 J1.D4 J1.E1 J1.E2 J1.E3 J1.E4 J1.G1 J1.G2 J1.G3 J1.G4 J1.H1 J1.H2 J1.H3 J1.H4 J1.K1 J1.K2 J1.L1 J1.L2 J1.L3 J1.L4 J1.Y29 J1.Z8 J1.Z9 J1.Z10 J1.Z11 J1.Z12 J1.Z20 J1.Z21 J1.Z22 J1.Z23 J1.Z24 J1.Z31 J1.Z32 J1.Z33 J1.Z34 J1.Z35 J1.Z36 J1.Z38 J1.Z48 J2.15 J3.7
copper on no net:
  other v2: 39.821,60.067 39.821,96.667 42.502,157.928 79.502,157.928

## Polygon pours and split planes (outlines as drawn)
GND on Layer 1 "GND_L02_P045" (solid, pour order 45): 35.496,164.973 170.434,164.973 170.434,33.02 35.622,33.02
Fan1_Fused on Layer 1 "FAN1_FUSED_L02_P044" (solid, pour order 44): 152,66.623 166.243,66.623 166.243,53.086 170.409,53.086 170.409,32.195 159.618,32.195 159.618,59.182 152,59.182
Fan2_Fused on Layer 1 "FAN2_FUSED_L02_P043" (solid, pour order 43): 152.019,59.182 152,59.182 152,52.565 152.019,47.498 156.21,45.977 156.21,32.258 160.528,32.258 160.528,59.182
GND on Bottom Layer "GND_L04_P047" (solid, pour order 47): 35.47,164.973 170.409,164.973 170.409,33.147 35.596,33.147
DCDC_OUT1 on Bottom Layer "DCDC_OUT1_L04_P039" (solid, pour order 39): 100.203,47.752 107.569,47.752 105.029,52.07 100.838,54.483 88.617,66.704 88.617,71.902 81.819,71.902 81.817,66.138 93.472,54.483 97.282,51.689
DCDC_Fused_Input on Bottom Layer "DCDC_FUSED_INPUT_L04_P040" (solid, pour order 40): 156.21,138.963 156.21,131.699 110.49,131.699 110.49,116.205 100.063,116.205 100.063,138.911
DCDC_OUT2 on Bottom Layer "DCDC_OUT2_L04_P038" (solid, pour order 38): 107.315,47.625 114.3,47.625 112.614,51.724 110.929,55.822 105.41,56.896 95.729,66.577 95.729,71.775 88.931,71.775 88.929,66.011 100.584,54.356 105.029,52.07
DCDC_OUT3 on Bottom Layer "DCDC_OUT3_L04_P037" (solid, pour order 37): 114.3,47.625 120.015,47.625 120.015,52.832 114.798,59.691 106.299,61.849 102.714,65.434 102.714,71.775 95.916,71.775 95.914,66.011 105.283,56.642 110.929,55.822
DCDC_OUT on Bottom Layer "DCDC_OUT_L04_P036" (solid, pour order 36): 109.855,97.79 109.855,87.63 105.283,87.63 103.378,85.725 103.378,81.28 80.645,81.28 80.645,97.79
Injection_Fused on Bottom Layer "INJECTION_FUSED_L04_P034" (solid, pour order 34): 155.259,81.365 155.259,88.271 141.732,88.271 138.811,90.17 125.368,90.17 125.368,75.067 130.885,75.067
Ignition_Fused on Bottom Layer "IGNITION_FUSED_L04_P027" (solid, pour order 27): 133.897,64.767 133.897,81.055 155.259,81.055 155.259,74 138.376,74 138.376,64.767
IGN_FUSED on Bottom Layer "IGN_FUSED_L04_P023" (solid, pour order 23): 141.487,74.422 141.487,53 144.653,53 144.653,47.498 138.557,47.498 138.557,74.422
INJ_FUSED on Bottom Layer "INJ_FUSED_L04_P012" (solid, pour order 12): 138.43,47.498 138.43,64.643 133.897,64.643 133.897,85.735 130.683,85.735 130.683,47.498
Fuelpump_Fused on Bottom Layer "FUELPUMP_FUSED_L04_P007" (solid, pour order 7): 155.259,66.5 155.259,74 141.605,74 141.605,53 145,53 145,64.643 152,64.643 152,66.5
FP_FUSED on Bottom Layer "FP_FUSED_L04_P004" (solid, pour order 4): 145,64.5 152,64.5 152,52.5 160,52.5 160,47.5 145,47.5
12V on Bottom Layer "12v" (solid, pour order 3): 164.338,138.782 170.434,138.782 170.434,37.084 161.925,37.084 161.925,52 164.338,52
GND on Layer 2 "GND_L03_P046" (solid, pour order 46): 35.496,164.973 170.434,164.973 170.434,33.02 35.622,33.02
DCDC_OUT on Layer 2 "DCDC_OUT_L03_P035" (solid, pour order 35): 109.855,97.79 109.855,87.63 105.283,87.63 103.378,85.725 103.378,81.28 80.645,81.28 80.645,97.79
Ignition_Fused on Layer 2 "IGNITION_FUSED_L03_P010" (solid, pour order 10): 134.239,64.767 134.239,81.055 155.259,81.055 155.259,74 138.376,74 138.376,64.767
Injection_Fused on Layer 2 "INJECTION_FUSED_L03_P021" (solid, pour order 21): 155.259,81.365 155.259,88.271 141.732,88.271 138.811,90.17 125.368,90.17 125.368,75.067 130.885,75.067
DCDC_Fused_Input on Layer 2 "DCDC_FUSED_INPUT_L03_P041" (solid, pour order 41): 156.21,138.963 156.21,131.699 110.49,131.699 110.49,116.205 100.063,116.205 100.063,138.911
IGN_FUSED on Layer 2 "IGN_FUSED_L03_P009" (solid, pour order 9): 141.487,74.422 141.487,53 144.653,53 144.653,47.498 138.557,47.498 138.557,74.422
INJ_FUSED on Layer 2 "INJ_FUSED_L03_P018" (solid, pour order 18): 138.43,47.498 138.43,64.643 133.897,64.643 133.897,85.735 130.683,85.735 130.683,47.498
Fuelpump_Fused on Layer 2 "FUELPUMP_FUSED_L03_P016" (solid, pour order 16): 155.259,66.508 155.259,74.008 141.605,74.008 141.605,53.008 145,53.008 145,64.651 152,64.651 152,66.508
FP_FUSED on Layer 2 "FP_FUSED_L03_P005" (solid, pour order 5): 145,64.5 152,64.5 152,52.5 160,52.5 160,47.5 145,47.5
12V on Layer 2 "12v" (solid, pour order 0): 164.338,138.782 170.434,138.782 170.434,37.084 161.925,37.084 161.925,52 164.338,52
GND on Top Layer "GND_L01_P048" (solid, pour order 48): 35.1,164.973 170.434,164.973 170.434,33.02 36.019,33.02
Fan1_Fused on Top Layer "FAN1_FUSED_L01_P014" (solid, pour order 14): 152,66.623 166.243,66.623 166.243,53.086 170.409,53.086 170.409,32.195 159.618,32.195 159.618,59.182 152,59.182
Fan2_Fused on Top Layer "FAN2_FUSED_L01_P013" (solid, pour order 13): 152.019,59.182 152,59.182 152,52.565 152.019,47.498 156.21,45.977 156.21,32.258 160.528,32.258 160.528,59.182

## Silkscreen, mask and mechanical layers (free items; w line width, h text height)
Top Overlay:
  lines w0.254: 38.502,117.428 38.502,161.428 83.502,161.428 83.502,117.428 ; 38.585,118.11 83.585,118.11 ; 36.321,55.467 70.321,55.467 70.321,109.467 36.321,109.467 36.321,55.467 ; 100.217,86.936 100.217,126.936 150.217,126.936 150.217,86.936 100.217,86.936
Bottom Overlay:
  region: 169.291,167.767
BoardOutline:
  lines w0.254: 35.496,32.258 35.496,164.973 170.434,164.973 170.434,32.131 35.623,32.131 35.496,32.258

## Text inside footprints (layer, text, board x,y; h text height)
J1: Mechanical 4 "PCB EDGE" at 184.219,32.133 h1.88; Mechanical 4 "PCB EDGE" at 184.219,32.133 h1.88
J2: Top Overlay "15" at 51.112,122.828 h1.02 r180; Top Overlay "16" at 51.112,121.028 h1.02 r180; Top Overlay "2" at 39.192,121.028 h1.02 r180; Top Overlay "1" at 39.592,122.828 h1.02 r180
J3: Top Overlay "2" at 57.232,121.028 h1.02 r180; Top Overlay "1" at 57.632,122.828 h1.02 r180; Top Overlay "8" at 64.072,121.028 h1.02 r180; Top Overlay "7" at 64.072,122.828 h1.02 r180
J4: Top Overlay "1" at 64.921,58.057 h1.02 r270; Top Overlay "2" at 66.721,57.657 h1.02 r270; Top Overlay "16" at 66.721,69.577 h1.02 r270; Top Overlay "15" at 64.921,69.577 h1.02 r270
J5: Top Overlay "5" at 101.805,159.005 h1.02 r90; Top Overlay "1" at 101.805,149.105 h1.02 r90